# EAGLE board SparkFun_RTK_EVK-Panel (EAGLE 9.6.2), part 1 of 2
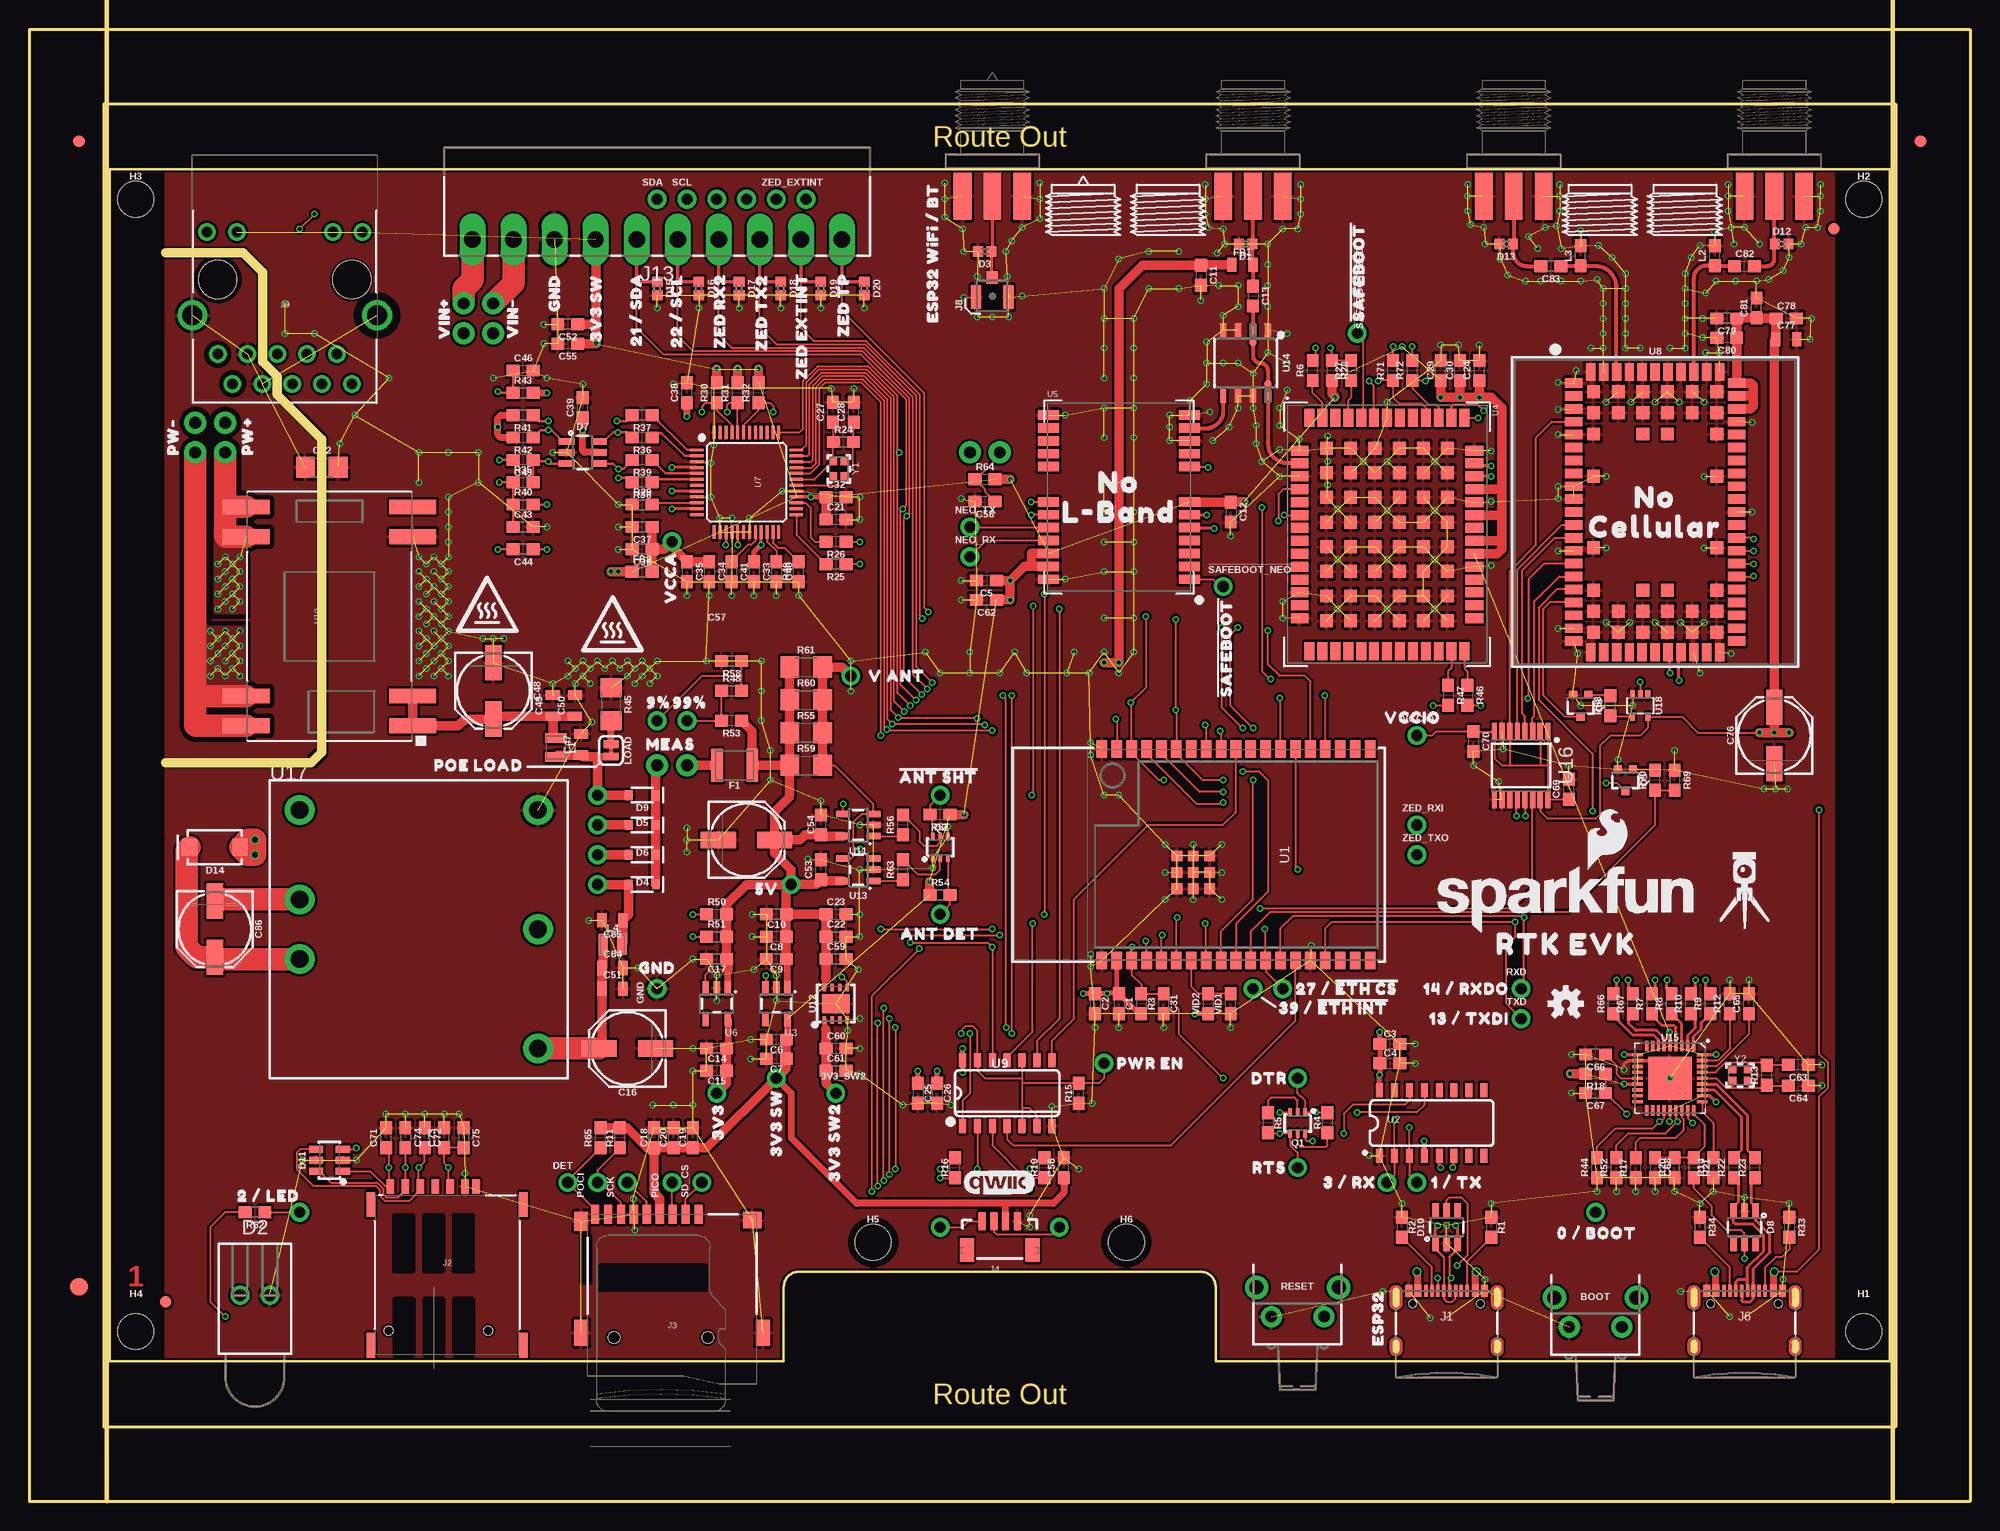
[diagram p0: board, top side]
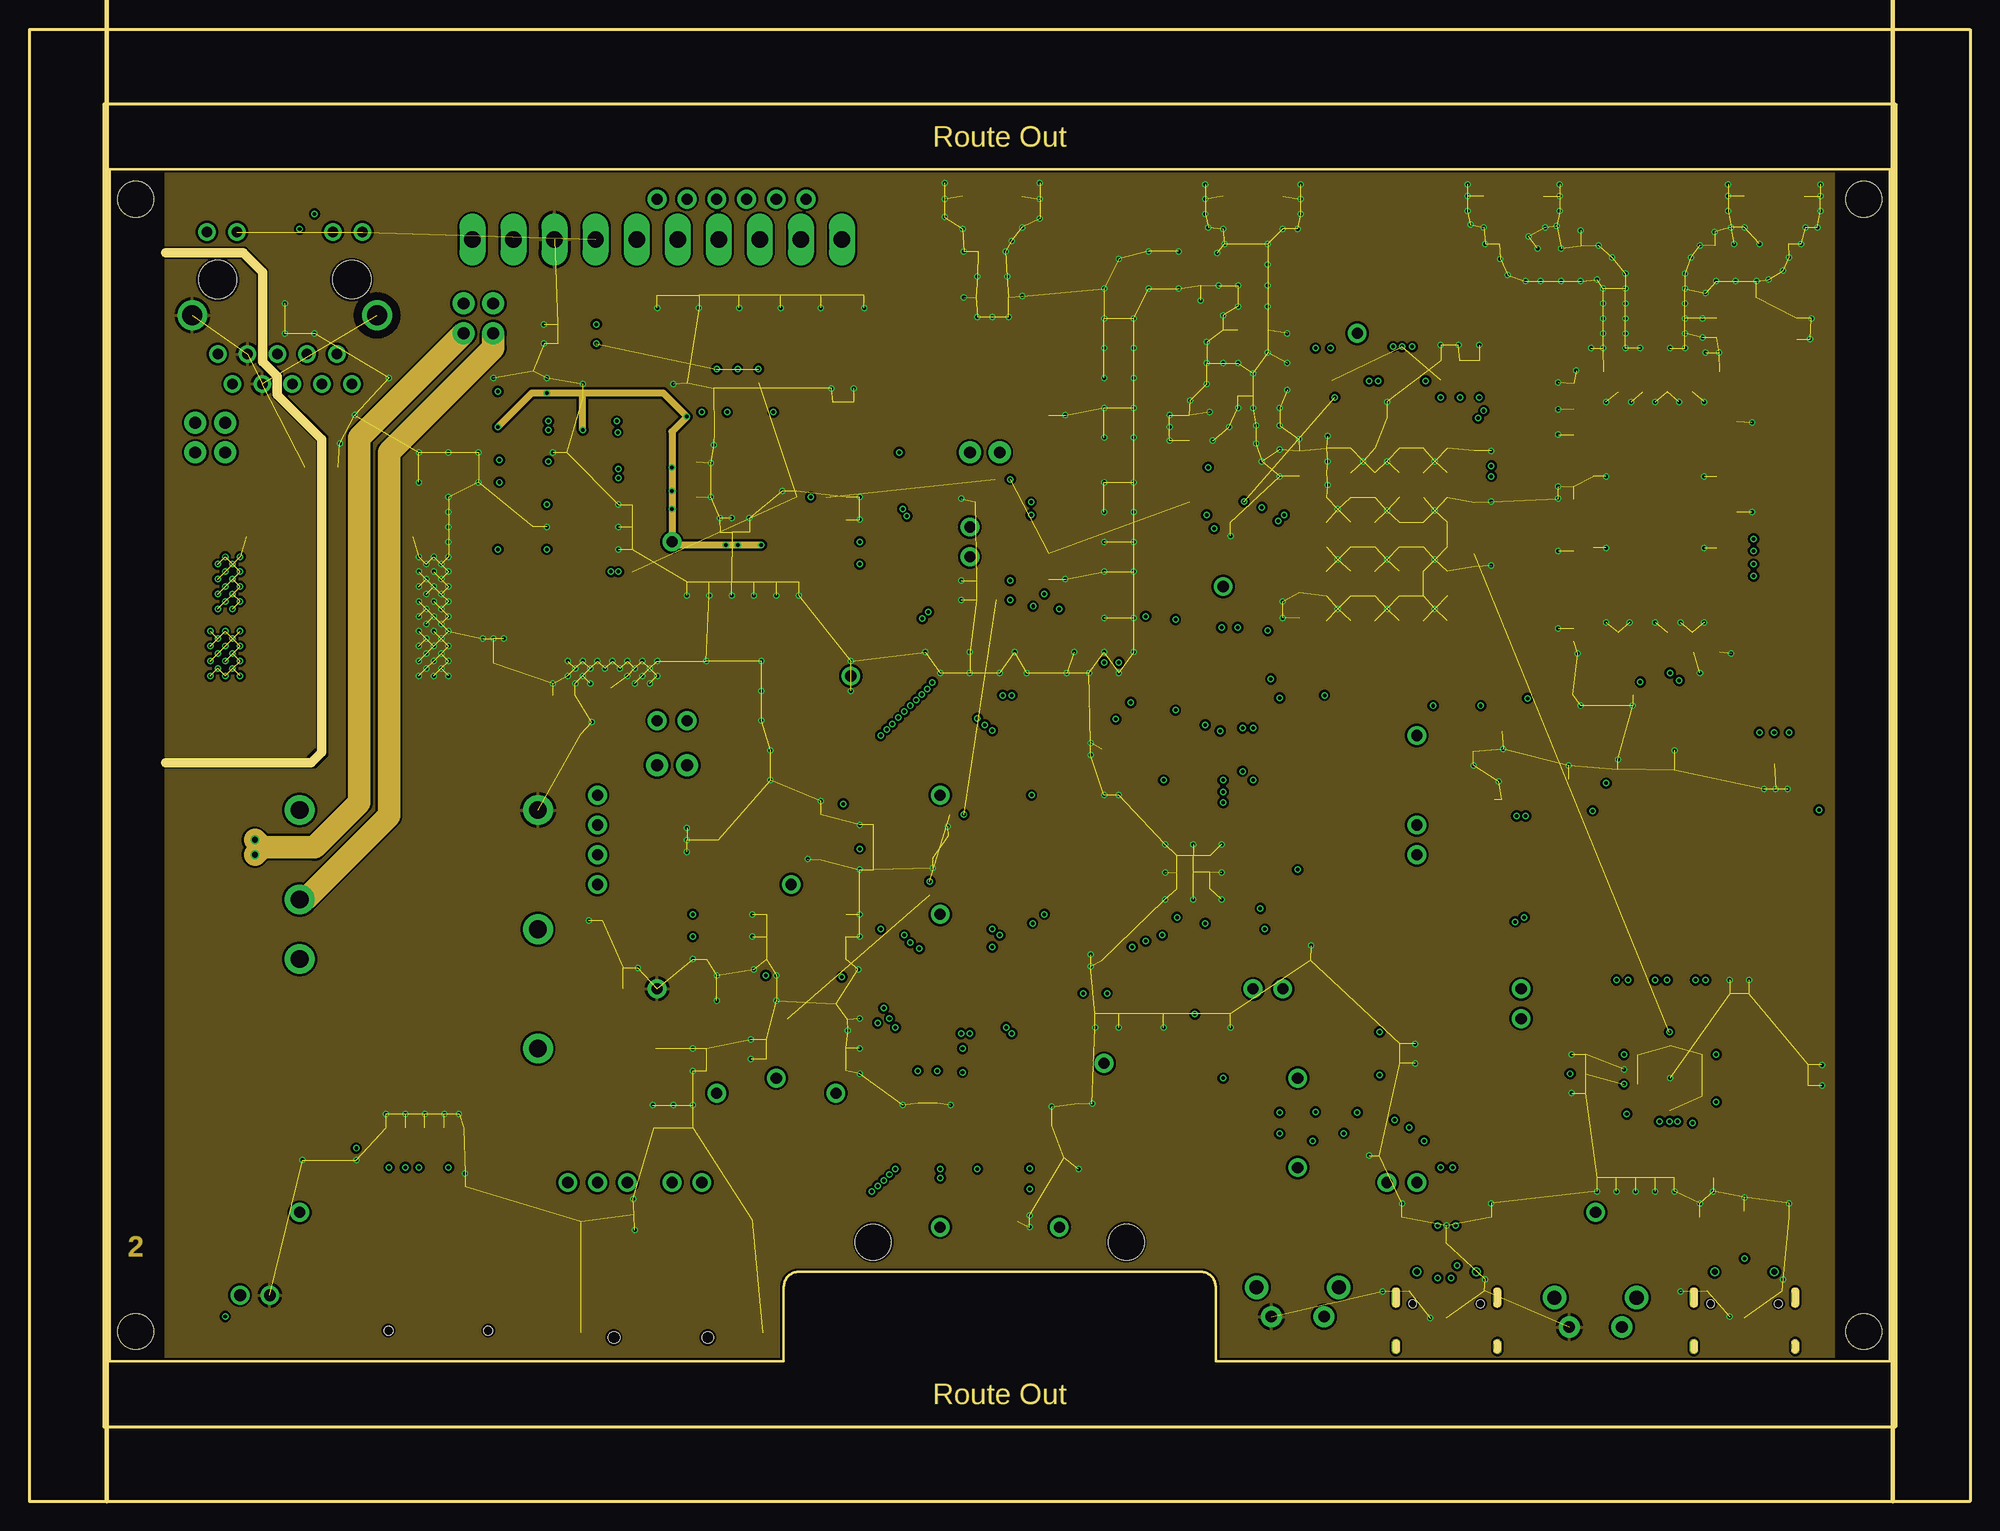
[diagram p1: board, inner layer Route2]
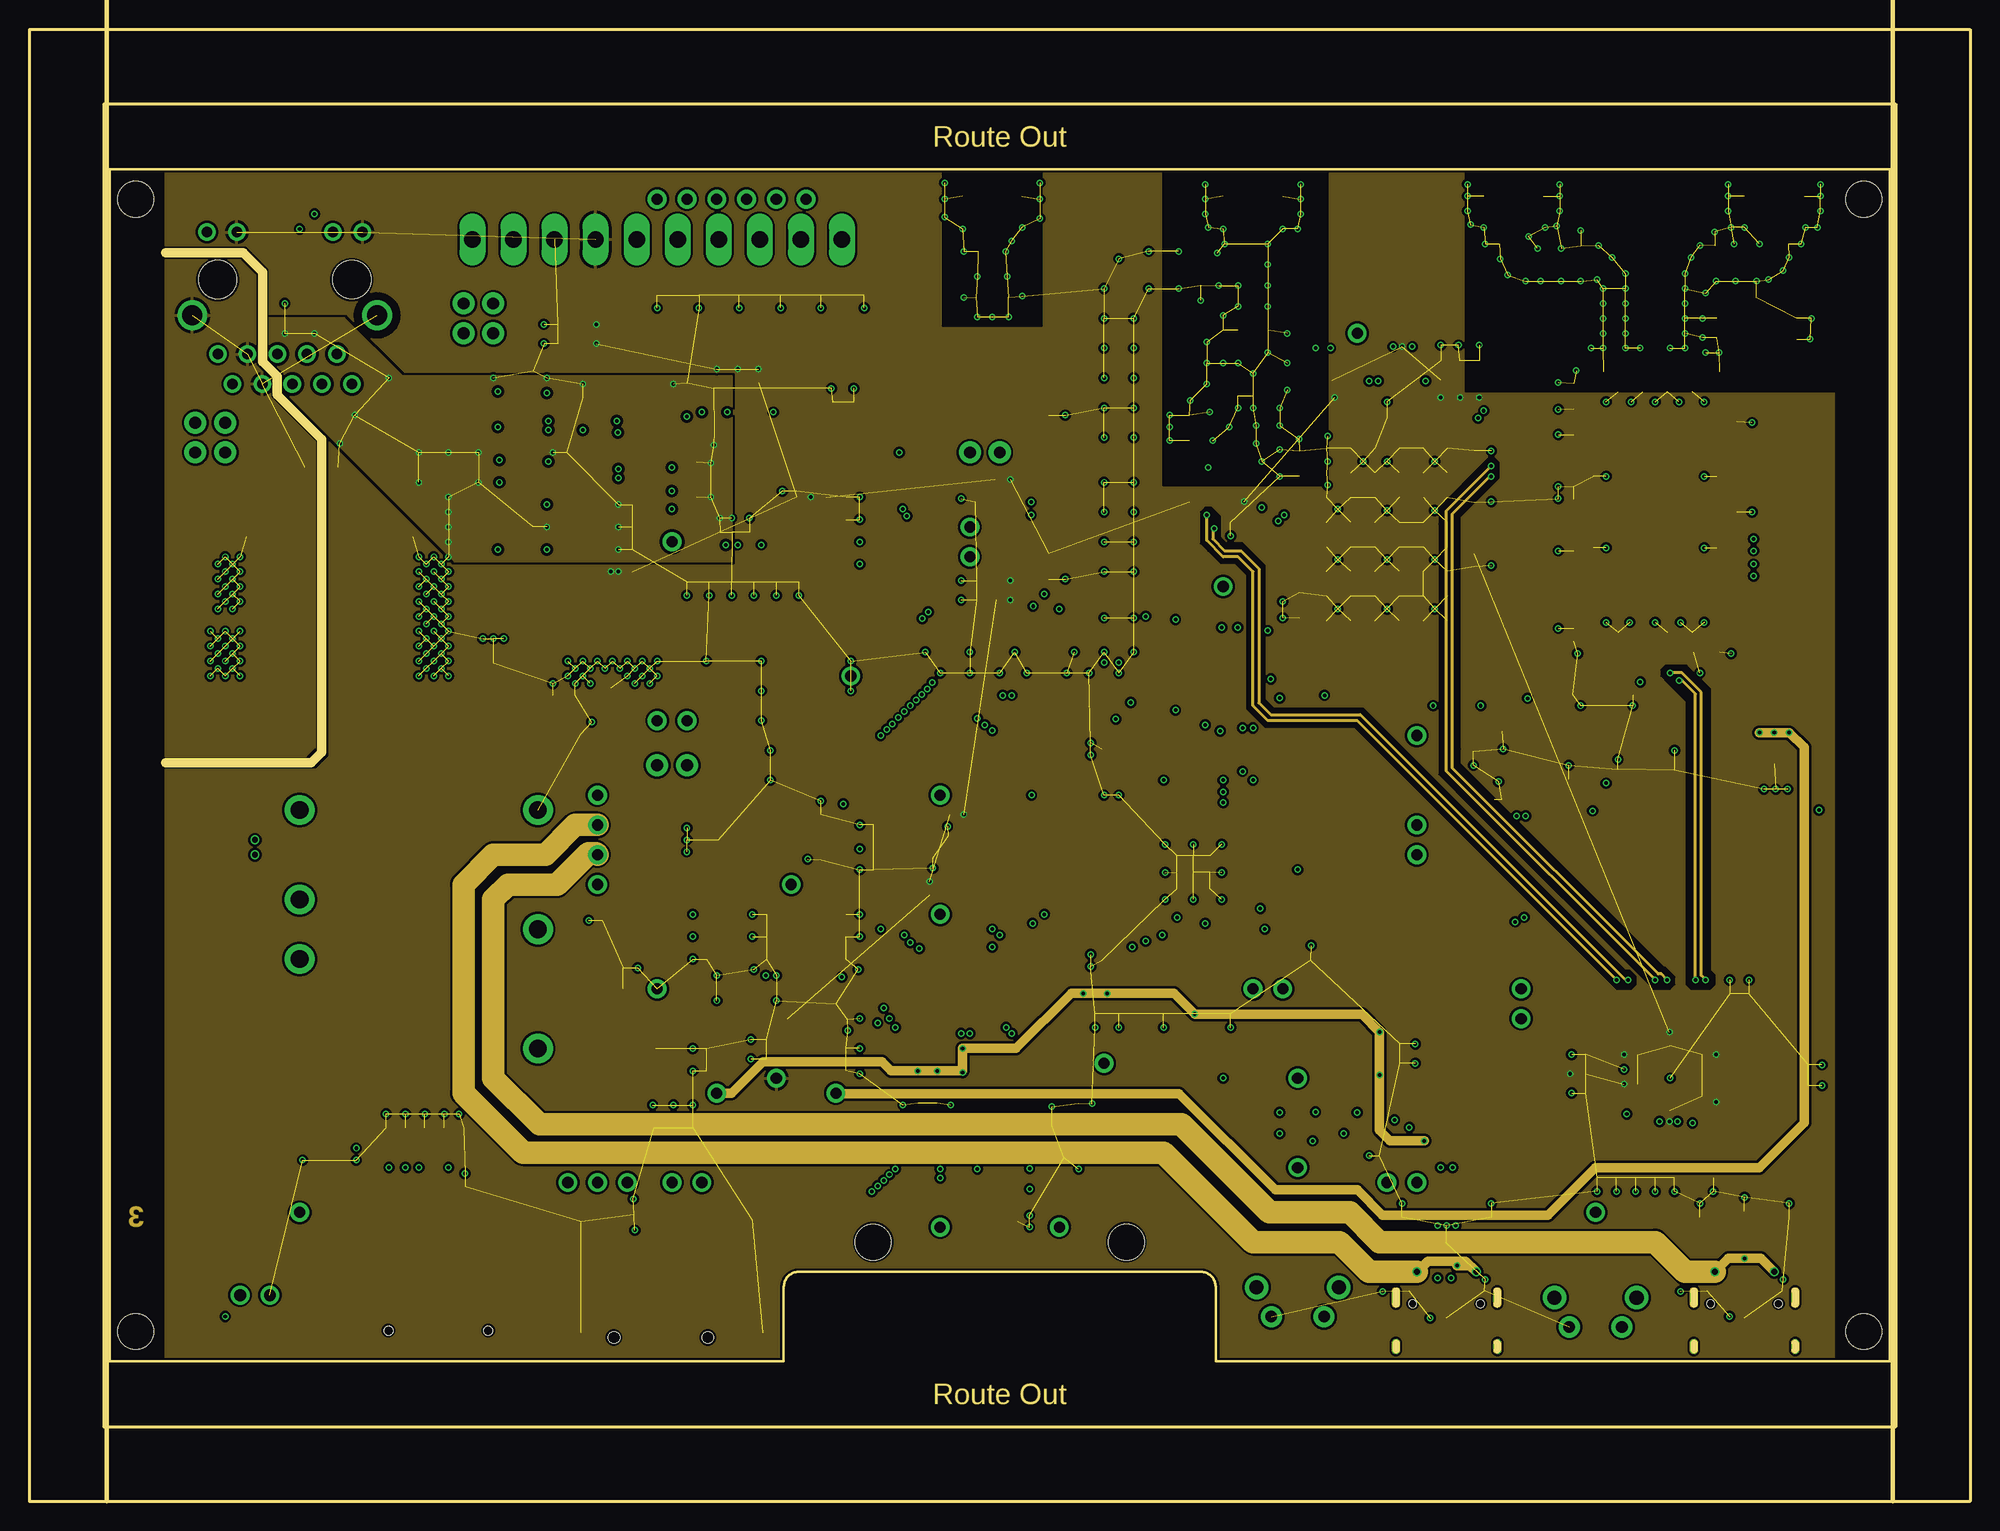
[diagram p2: board, inner layer Route15]
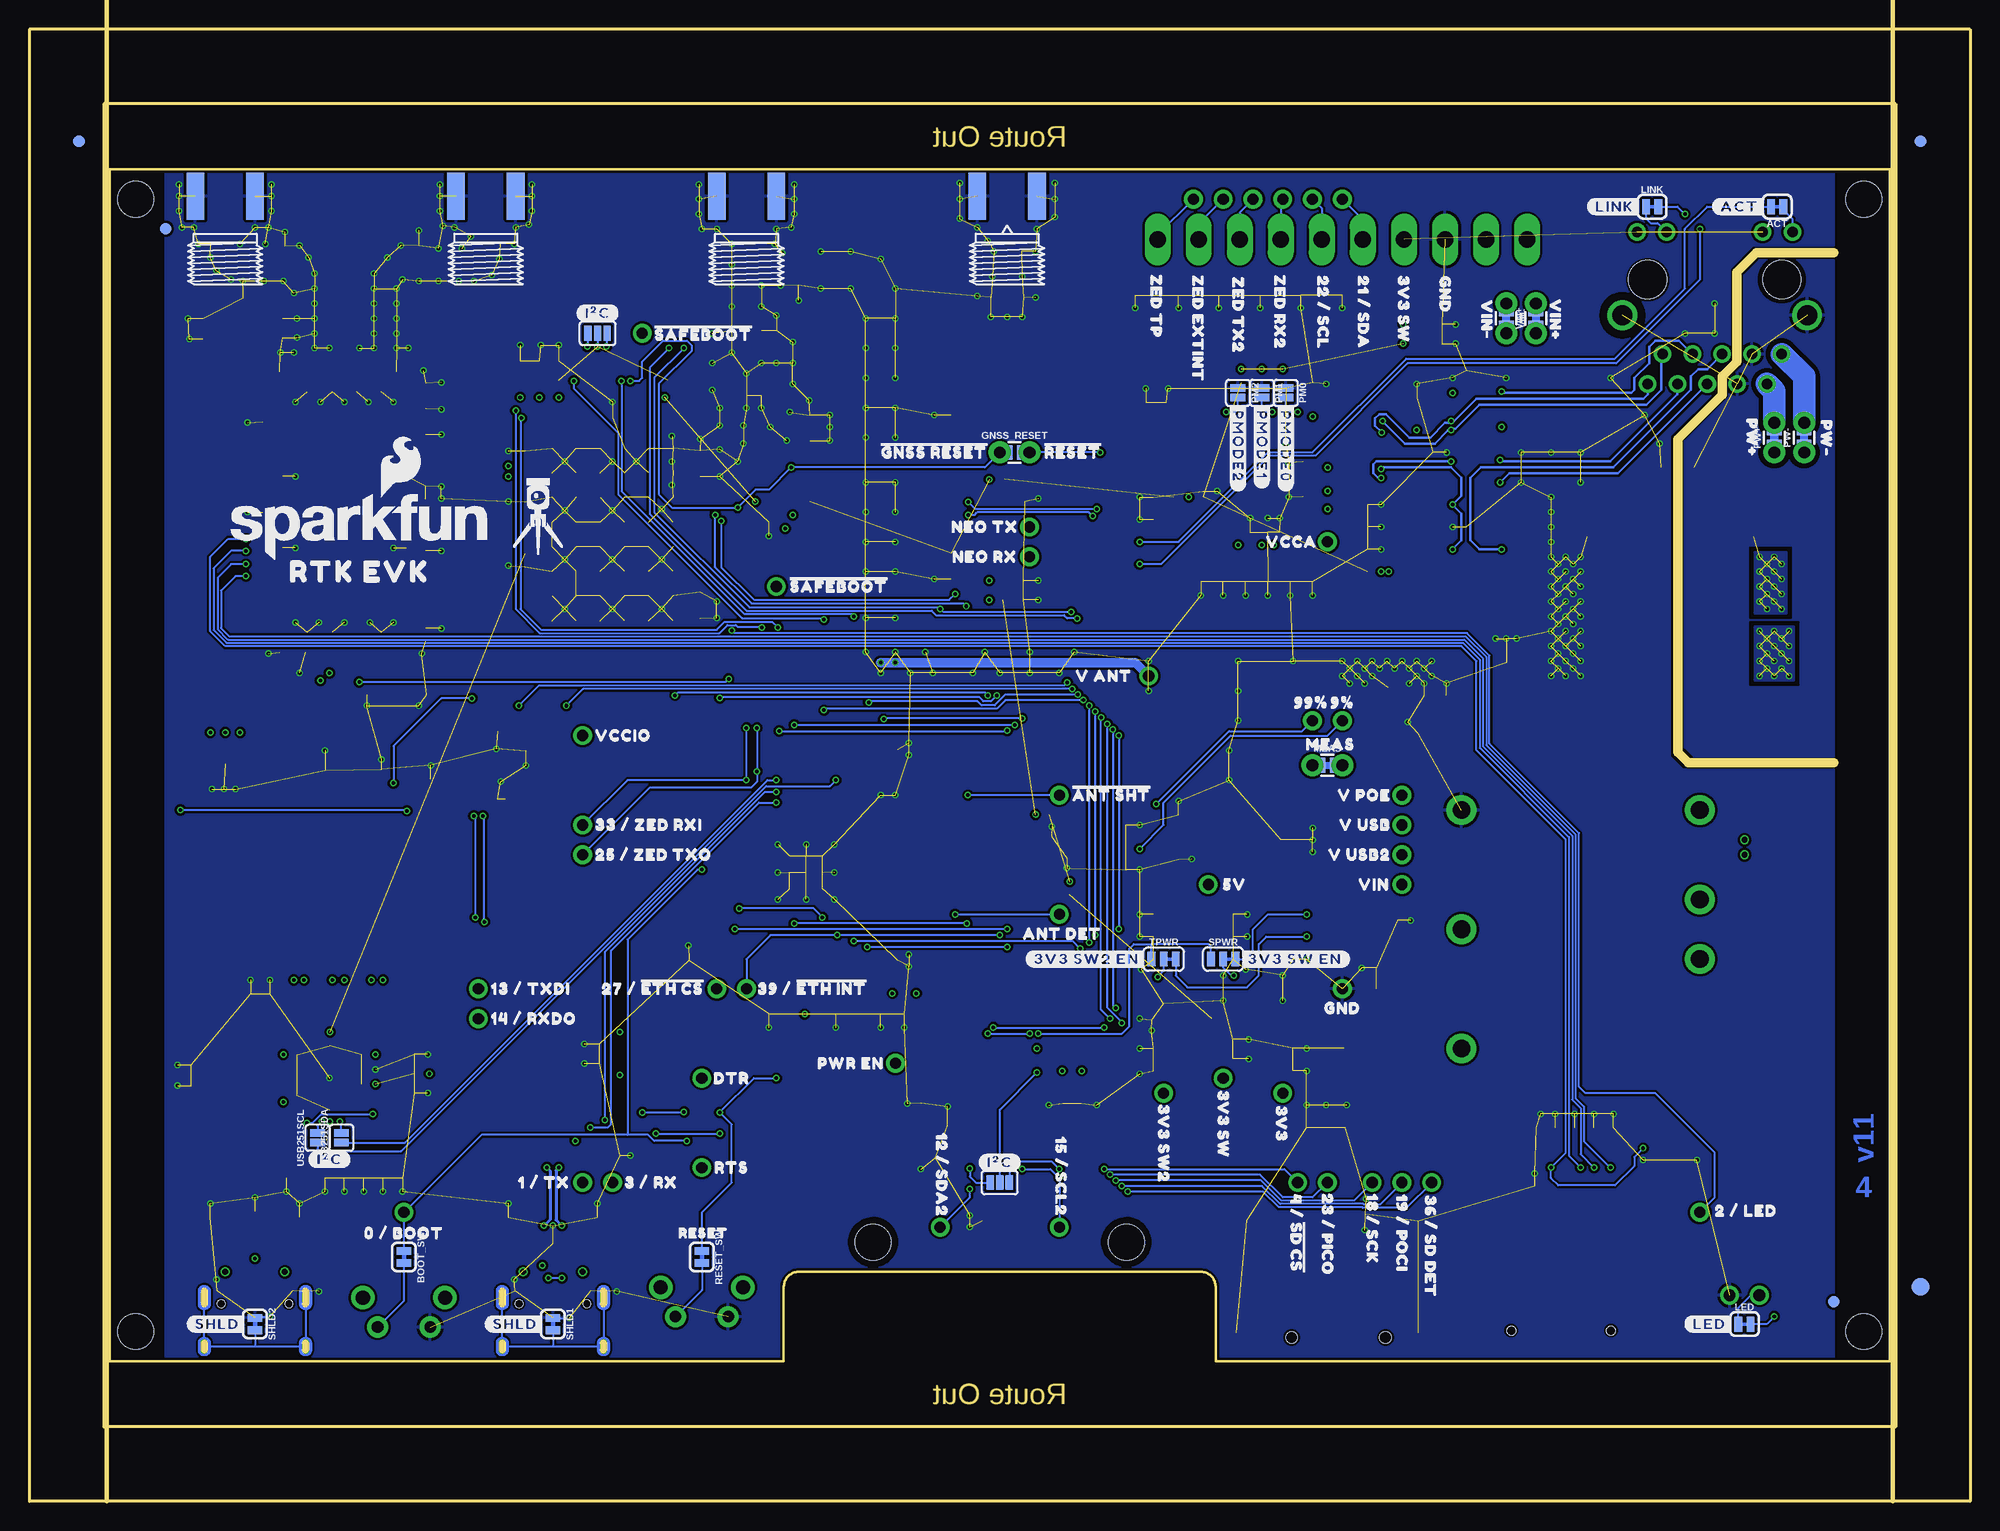
[diagram p3: board, bottom side, seen from below]

Size 165.48 x 125.48 mm. Coordinates in mm from the lower left corner, seen from the top.
Outline: 6.86,11.94 64.33,11.94 64.33,18.29 arc-90 65.59,19.56 99.89,19.56 arc-90 101.16,18.29 101.16,11.94 158.62,11.94 158.62,113.54 6.86,113.54 6.86,11.94
Outline: 0,0 165.48,0 165.48,125.48 0,125.48 0,0
Outline: 6.35,6.35 159.13,6.35 159.13,119.13 6.35,119.13 6.35,6.35
Copper layers (1*2*15*16): Top 0.035559375mm / dielectric 0.47751875mm / Route2 0.035559375mm / dielectric 0.47751875mm / Route15 0.035559375mm / dielectric 0.47751875mm / Bottom 0.035559375mm
Design rules "SparkFun_RTK_EVK": minimum track width 5mil, minimum drill 0.2mm, track to track 5mil, track to pad 5mil, pad to pad 5mil, via to via 5mil, smd to smd 5mil, copper to edge 7mil, drill to drill 7mil, minimum pad ring 5mil, minimum via ring 5mil, stop-mask expansion 2.5mil, vias tented up to drill 25mil, thermal gap 10mil
tKeepout: area 6.9,18.3 to 11.6,107.2; area 153.9,18.3 to 158.6,107.2
tRestrict: 1 lines
Milling: 11 lines

## Footprints (pad centres in the part's own frame; a part is rotated, then mirrored left to right if it is on the bottom)
1X01_NO_SILK = drill 0.95 pad 1.6: 1 0,0
SMT-JUMPER_2_NC_TRACE_SILK = smd 0.66 x 1.27: 1 -0.521,0; 2 0.521,0
TACTILE_SWITCH_PTH_RA_8-020 = drill 1 pad 1.8: 1 -2.25,0; 2 2.25,0 | drill 1.2 pad 2: M1 -3.5,2.5; M2 3.5,2.5
SMT-JUMPER_2_SOIC-PAD_NO-PASTE = smd 0.55 x 0.55: 1 1.75,0
0603 = smd 1.1 x 1: 1 -0.85,0; 2 0.85,0
PANASONIC_D = smd 3 x 1.4: + 2.4,0; - -2.4,0
1206 = smd 1.6 x 1.8: 1 -1.4,0; 2 1.4,0
0805 = smd 0.8 x 1.2: 1 -0.9,0; 2 0.9,0
0402 = smd 0.85 x 0.9: 1 -0.58,0; 2 0.58,0
CBI-RIGHT-ANGLE-PTH = drill 1 pad 1.6: A -1.27,5; C 1.27,5
SOD-323 = smd 0.63 x 0.83: A 1.15,0; C -1.15,0
SOT-23-6 = smd 0.55 x 1.35: 1 -0.95,-1.375; 2 0,-1.375; 3 0.95,-1.375; 4 0.95,1.375; 5 0,1.375; 6 -0.95,1.375
SOT23-6L = smd 0.6 x 1.2: 1 -0.95,-1.15; 2 0,-1.15; 3 0.95,-1.15; 4 0.95,1.15; 5 0,1.15; 6 -0.95,1.15
SMA-DIODE = smd 1.27 x 1.47: A -2.15,0; C 2.15,0
FIDUCIAL-1X2 = smd 1 x 1: 1 0,0
FIDUCIAL-1.5X3 = smd 1.5 x 1.5: 1 0,0
RP-SMA-EDGE = smd 1.5 x 4: GND@0 -2.54,0; GND@1 2.54,0; SIG 0,0 | smd 1.5 x 4 bottom: GND@2 -2.54,0; GND@3 2.54,0
1210 = smd 1 x 2.8: 1 -1.5,0; 2 1.5,0
COMBO-JUMPER_2_NO = smd 0.635 x 1.27: 1 -0.508,0; 2 0.508,0 | drill 1.016 pad 1.88: 3 -1.27,0; 4 1.27,0
SMA-EDGE = smd 1.5 x 4: GND@0 -2.54,0; GND@1 2.54,0; SIG 0,0 | smd 1.5 x 4 bottom: GND@2 -2.54,0; GND@3 2.54,0
STAND-OFF-TIGHT = hole 3.048: 0,0
SMT-JUMPER_3_NO_SILK = smd 0.635 x 1.27: 1 -0.813,0; 2 0,0; 3 0.813,0
USB-C-16P_4LAYER-PADS = smd 0.3 x 1: A5 -1.25,-0.34; A6 -0.25,-0.34; A7 0.25,-0.34; A8 1.25,-0.34; B5 1.75,-0.34; B6 0.75,-0.34; B7 -0.75,-0.34; B8 -1.75,-0.34 | smd 0.6 x 1: GND -3.225,-0.34; GND2 3.225,-0.34; VBUS1 -2.45,-0.34; VBUS2 2.45,-0.34 | drill 0.4 pad 0.6 long: SHLD1 -4.318,-0.915; SHLD2 4.318,-0.915; SHLD3 -4.318,-5.095; SHLD4 4.318,-5.095 | hole 0.65: -2.89,-1.445; 2.89,-1.445
NANO_SIM_PP = smd 0.7 x 2.1: A1 6.495,6; A2 -6.495,6; A3 -6.495,-6; A4 6.495,-6 | smd 0.65 x 1.23: C1 0.255,7.535; C2 -2.285,7.535; C3 -4.825,7.535; C5 1.525,7.535; C6 -1.015,7.535; C7 -3.555,7.535; CD 2.475,7.535 | hole 0.75: 3.505,-4.75; -4.995,-4.75
MICROSD-EXTERNALPIN = smd 0.7 x 1.6: 1 2.25,10.5; 2 1.15,10.5; 3 0.05,10.5; 4 -1.05,10.5; 5 -2.15,10.5; 6 -3.25,10.5; 7 -4.35,10.5; 8 -5.45,10.5; 9 -6.55,10.5 | smd 1.2 x 1.6: 10 -7.75,9.9 | smd 1.2 x 2.2: 11 -7.75,0.4; 12 7.75,0.4 | smd 1.6 x 1.4: 13 6.85,10 | hole 1: 3.05,0; -4.95,0
JST04_1MM_VERT = smd 0.6 x 1.55: 1 -1.5,0.775; 2 -0.5,0.775; 3 0.5,0.775; 4 1.5,0.775 | smd 1.2 x 2: NC1 -2.8,3.2; NC2 2.8,3.2
U.FL_REDUCED_FOOTPRINT = smd 2 x 0.85: 1 -0.1,1.375; 2 -0.1,-1.375 | smd 1.05 x 1: FEED 1.575,0
MAGJACK-SYM_LED = drill 0.9 pad 1.5: 1 -5.715,8.89; 2 -4.445,6.35; 3 -3.175,8.89; 4 -1.905,6.35; 5 -0.635,8.89; 6 0.635,6.35; 7 1.905,8.89; 8 3.175,6.35; 9 4.445,8.89; 10 5.715,6.35; 11 -6.63,-4.06; 12 -4.09,-4.06; 13 4.09,-4.06; 14 6.63,-4.06 | drill 1.7 pad 2.4: S1 -7.875,3.05; S2 7.875,3.05 | hole 3.25: -5.715,0; 5.715,0
1X10_SCREW_TERMINAL_3.5MM = drill 1.4 pad 2.2 long: 1 -15.75,2.8; 2 -12.25,2.8; 3 -8.75,2.8; 4 -5.25,2.8; 5 -1.75,2.8; 6 1.75,2.8; 7 5.25,2.8; 8 8.75,2.8; 9 12.25,2.8; 10 15.75,2.8
0805-WIDE = smd 0.8 x 1.8: 1 -0.8,0; 2 0.8,0
0603_NO-CREAM = smd 1.1 x 1: 1 -0.85,0; 2 0.85,0
COMBO-JUMPER_2_NC_TRACE = smd 0.635 x 1.27: 1 -0.508,0; 2 0.508,0 | drill 1.016 pad 1.88: 3 -1.27,0; 4 1.27,0
SMT-JUMPER_2_NO_SILK = smd 0.635 x 1.27: 1 -0.406,0; 2 0.406,0
SC70-6 = smd 0.3 x 0.66: 1 -0.65,-0.92; 2 0,-0.92; 3 0.65,-0.92; 4 0.65,0.92; 5 0,0.92; 6 -0.65,0.92
SOT323 = smd 0.7 x 0.7: 1 -0.65,-0.925; 2 0.65,-0.925; 3 0,0.925
SMT-JUMPER_3_1-NC_TRACE_SILK = smd 0.66 x 1.27: 1 -1.041,0; 2 0,0; 3 1.041,0
ESP32-WROVER-E/IE = smd 0.9 x 1.5: 1 7.8,9; 2 6.53,9; 3 5.26,9; 4 3.99,9; 5 2.72,9; 6 1.45,9; 7 0.18,9; 8 -1.09,9; 9 -2.36,9; 10 -3.63,9; 11 -4.9,9; 12 -6.17,9; 13 -7.44,9; 14 -8.71,9; 15 -9.98,9; 16 -11.25,9; 17 -12.52,9; 18 -13.79,9; 19 -15.06,9; 20 -15.06,-9; 21 -13.79,-9; 22 -12.52,-9; 23 -11.25,-9; 24 -9.98,-9; 25 -8.71,-9; 26 -7.44,-9; 27 -6.17,-9; 28 -4.9,-9; 29 -3.63,-9; 30 -2.36,-9; 31 -1.09,-9; 32 0.18,-9; 33 1.45,-9; 34 2.72,-9; 35 3.99,-9; 36 5.26,-9; 37 6.53,-9; 38 7.8,-9 | smd 0.9 x 0.9: GND 0,1.5; GNDT1 -1.4,2.9; GNDT2 -1.4,1.5; GNDT3 -1.4,0.1; GNDT4 0,0.1; GNDT5 1.4,0.1; GNDT6 1.4,1.5; GNDT7 1.4,2.9; GNDT8 0,2.9
SO016 = smd 0.6 x 1.2: 1 -4.445,-2.8; 2 -3.175,-2.8; 3 -1.905,-2.8; 4 -0.635,-2.8; 5 0.635,-2.8; 6 1.905,-2.8; 7 3.175,-2.8; 8 4.445,-2.8; 9 4.445,2.8; 10 3.175,2.8; 11 1.905,2.8; 12 0.635,2.8; 13 -0.635,2.8; 14 -1.905,2.8; 15 -3.175,2.8; 16 -4.445,2.8
SOT23-5 = smd 0.55 x 1.2: 1 -0.95,-1.3; 2 0,-1.3; 3 0.95,-1.3; 4 0.95,1.3; 5 -0.95,1.3
ZED-F9P = smd 0.85 x 1.52: 1 -7.15,-7.45; 2 -6.05,-7.45; 3 -4.95,-7.45; 4 -3.85,-7.45; 5 -2.75,-7.45; 6 -1.65,-7.45; 7 -0.55,-7.45; 8 0.55,-7.45; 9 1.65,-7.45; 10 2.75,-7.45; 11 3.85,-7.45; 12 4.95,-7.45; 13 6.05,-7.45; 14 7.15,-7.45; 28 7.15,7.45; 29 6.05,7.45; 30 4.95,7.45; 31 3.85,7.45; 32 2.75,7.45; 33 1.65,7.45; 34 0.55,7.45; 35 -0.55,7.45; 36 -1.65,7.45; 37 -2.75,7.45; 38 -3.85,7.45; 39 -4.95,7.45; 40 -6.05,7.45; 41 -7.15,7.45 | smd 1.52 x 0.85: 15 9.95,-6.6; 16 9.95,-5.5; 17 9.95,-4.4; 18 9.95,-3.3; 19 9.95,-2.2; 20 9.95,-1.1; 21 9.95,0; 22 9.95,1.1; 23 9.95,2.2; 24 9.95,3.3; 25 9.95,4.4; 26 9.95,5.5; 27 9.95,6.6; 42 -9.95,6.6; 43 -9.95,5.5; 44 -9.95,4.4; 45 -9.95,3.3; 46 -9.95,2.2; 47 -9.95,1.1; 48 -9.95,0; 49 -9.95,-1.1; 50 -9.95,-2.2; 51 -9.95,-3.3; 52 -9.95,-4.4; 53 -9.95,-5.5; 54 -9.95,-6.6 | smd 1.1 x 1.1: 55 -1.05,-1.05; 56 -3.15,-1.05; 57 -5.25,-1.05; 58 -7.35,-1.05; 59 -1.05,-3.1; 60 -3.15,-3.1; 61 -5.25,-3.1; 62 -7.35,-3.1; 63 -1.05,-5.15; 64 -3.15,-5.15; 65 -5.25,-5.15; 66 -7.35,-5.15; 67 -1.05,5.15; 68 -3.15,5.15; 69 -5.25,5.15; 70 -7.35,5.15; 71 -1.05,3.1; 72 -3.15,3.1; 73 -5.25,3.1; 74 -7.35,3.1; 75 -1.05,1.05; 76 -3.15,1.05; 77 -5.25,1.05; 78 -7.35,1.05; 79 1.05,1.05; 80 3.15,1.05; 81 5.25,1.05; 82 7.35,1.05; 83 1.05,3.1; 84 3.15,3.1; 85 5.25,3.1; 86 7.35,3.1; 87 1.05,5.15; 88 3.15,5.15; 89 5.25,5.15; 90 7.35,5.15; 91 1.05,-5.15; 92 3.15,-5.15; 93 5.25,-5.15; 94 7.35,-5.15; 95 1.05,-3.1; 96 3.15,-3.1; 97 5.25,-3.1; 98 7.35,-3.1; 99 1.05,-1.05; 100 3.15,-1.05; 101 5.25,-1.05; 102 7.35,-1.05
NEO-M9N/M8T/M8U/D9S = smd 1.8 x 0.8: 1 6,-7; 2 6,-5.9; 3 6,-4.8; 4 6,-3.7; 5 6,-2.6; 6 6,-1.5; 7 6,-0.4; 8 6,2.6; 9 6,3.7; 10 6,4.8; 11 6,5.9; 12 6,7; 13 -6,7; 14 -6,5.9; 15 -6,4.8; 16 -6,3.7; 17 -6,2.6; 18 -6,-0.4; 19 -6,-1.5; 20 -6,-2.6; 21 -6,-3.7; 22 -6,-4.8; 23 -6,-5.9; 24 -6,-7
LQFP-48 = smd 0.254 x 1.143: 1 -2.75,-4.25; 2 -2.25,-4.25; 3 -1.75,-4.25; 4 -1.25,-4.25; 5 -0.75,-4.25; 6 -0.25,-4.25; 7 0.25,-4.25; 8 0.75,-4.25; 9 1.25,-4.25; 10 1.75,-4.25; 11 2.25,-4.25; 12 2.75,-4.25; 25 2.75,4.25; 26 2.25,4.25; 27 1.75,4.25; 28 1.25,4.25; 29 0.75,4.25; 30 0.25,4.25; 31 -0.25,4.25; 32 -0.75,4.25; 33 -1.25,4.25; 34 -1.75,4.25; 35 -2.25,4.25; 36 -2.75,4.25 | smd 1.143 x 0.254: 13 4.25,-2.75; 14 4.25,-2.25; 15 4.25,-1.75; 16 4.25,-1.25; 17 4.25,-0.75; 18 4.25,-0.25; 19 4.25,0.25; 20 4.25,0.75; 21 4.25,1.25; 22 4.25,1.75; 23 4.25,2.25; 24 4.25,2.75; 37 -4.25,2.75; 38 -4.25,2.25; 39 -4.25,1.75; 40 -4.25,1.25; 41 -4.25,0.75; 42 -4.25,0.25; 43 -4.25,-0.25; 44 -4.25,-0.75; 45 -4.25,-1.25; 46 -4.25,-1.75; 47 -4.25,-2.25; 48 -4.25,-2.75
LARA-LGA = smd 0.8 x 1.5: 1 -11,-6.95; 2 -9.9,-6.95; 3 -8.8,-6.95; 4 -7.7,-6.95; 5 -6.6,-6.95; 6 -5.5,-6.95; 7 -4.4,-6.95; 8 -3.3,-6.95; 9 -2.2,-6.95; 10 -1.1,-6.95; 11 0,-6.95; 12 1.1,-6.95; 13 2.2,-6.95; 14 3.3,-6.95; 15 4.4,-6.95; 16 5.5,-6.95; 17 6.6,-6.95; 18 7.7,-6.95; 19 8.8,-6.95; 20 9.9,-6.95; 21 11,-6.95; 33 11,6.95; 34 9.9,6.95; 35 8.8,6.95; 36 7.7,6.95; 37 6.6,6.95; 38 5.5,6.95; 39 4.4,6.95; 40 3.3,6.95; 41 2.2,6.95; 42 1.1,6.95; 43 0,6.95; 44 -1.1,6.95; 45 -2.2,6.95; 46 -3.3,6.95; 47 -4.4,6.95; 48 -5.5,6.95; 49 -6.6,6.95; 50 -7.7,6.95; 51 -8.8,6.95; 52 -9.9,6.95; 53 -11,6.95 | smd 1.5 x 0.8: 22 11.95,-5.5; 23 11.95,-4.4; 24 11.95,-3.3; 25 11.95,-2.2; 26 11.95,-1.1; 27 11.95,0; 28 11.95,1.1; 29 11.95,2.2; 30 11.95,3.3; 31 11.95,4.4; 32 11.95,5.5; 54 -11.95,5.5; 55 -11.95,4.4; 56 -11.95,3.3; 57 -11.95,2.2; 58 -11.95,1.1; 59 -11.95,0; 60 -11.95,-1.1; 61 -11.95,-2.2; 62 -11.95,-3.3; 63 -11.95,-4.4; 64 -11.95,-5.5 | smd 1.1 x 1.1: 65 -10.25,-5.25; 66 -10.25,-3.15; 67 -10.25,-1.05; 68 -10.25,1.05; 69 -10.25,3.15; 70 -10.25,5.25; 71 -8.45,-5.25; 72 -8.45,-3.15; 73 -8.45,-1.05; 74 -8.45,1.05; 75 -8.45,3.15; 76 -8.45,5.25; 77 -6.65,-5.25; 78 -6.65,5.25; 79 -3.05,-5.25; 80 -3.05,5.25; 81 3.05,-5.25; 82 3.05,5.25; 83 6.65,-5.25; 84 6.65,5.25; 85 8.45,-5.25; 86 8.45,-3.15; 87 8.45,-1.05; 88 8.45,1.05; 89 8.45,3.15; 90 8.45,5.25; 91 10.25,-5.25; 92 10.25,-3.15; 93 10.25,-1.05; 94 10.25,1.05; 95 10.25,3.15; 96 10.25,5.25; 97 -6.65,-1.05; 98 -6.65,1.05; 99 6.65,-1.05; 100 6.65,1.05
SO14 = smd 0.6 x 1.2: 1 -3.175,-2.8; 2 -1.905,-2.8; 3 -0.635,-2.8; 4 0.635,-2.8; 5 1.905,-2.8; 6 3.175,-2.8; 7 4.445,-2.8; 8 4.445,2.8; 9 3.175,2.8; 10 1.905,2.8; 11 0.635,2.8; 12 -0.635,2.8; 13 -1.905,2.8; 14 -3.175,2.8
DP990X = smd 1.25 x 4: 1 -9.33,-7.1; 2 -6.79,-7.1; 3 6.79,-7.1; 4 9.33,-7.1; 5 9.33,7.1; 6 6.79,7.1; 7 -6.79,7.1; 8 -9.33,7.1
UDFN-8 = smd 0.3 x 0.65: 1 -0.975,-1.375; 2 -0.325,-1.375; 3 0.325,-1.375; 4 0.975,-1.375; 5 0.975,1.375; 6 0.325,1.375; 7 -0.325,1.375; 8 -0.975,1.375 | smd 2.35 x 1.6: EP 0,0
XX21 = smd 0.6 x 1.2: 1 -1.905,-2.8; 2 -0.635,-2.8; 3 0.635,-2.8; 4 1.905,-2.8; 5 1.905,2.8; 6 0.635,2.8; 7 -0.635,2.8; 8 -1.905,2.8
QFN-36 = smd 0.9 x 0.28: 1 -2.75,2; 2 -2.75,1.5; 3 -2.75,1; 4 -2.75,0.5; 5 -2.75,0; 6 -2.75,-0.5; 7 -2.75,-1; 8 -2.75,-1.5; 9 -2.75,-2; 19 2.75,-2; 20 2.75,-1.5; 21 2.75,-1; 22 2.75,-0.5; 23 2.75,0; 24 2.75,0.5; 25 2.75,1; 26 2.75,1.5; 27 2.75,2 | smd 0.28 x 0.9: 10 -2,-2.75; 11 -1.5,-2.75; 12 -1,-2.75; 13 -0.5,-2.75; 14 0,-2.75; 15 0.5,-2.75; 16 1,-2.75; 17 1.5,-2.75; 18 2,-2.75; 28 2,2.75; 29 1.5,2.75; 30 1,2.75; 31 0.5,2.75; 32 0,2.75; 33 -0.5,2.75; 34 -1,2.75; 35 -1.5,2.75; 36 -2,2.75 | smd 3.7 x 3.7: EP 0,0
SOP65P640X120-16N = smd 1.5 x 0.45: 1 -2.9,2.275; 2 -2.9,1.625; 3 -2.9,0.975; 4 -2.9,0.325; 5 -2.9,-0.325; 6 -2.9,-0.975; 7 -2.9,-1.625; 8 -2.9,-2.275; 9 2.9,-2.275; 10 2.9,-1.625; 11 2.9,-0.975; 12 2.9,-0.325; 13 2.9,0.325; 14 2.9,0.975; 15 2.9,1.625; 16 2.9,2.275
URB_YMD-15WR3 = drill 1.499 pad 2.54: 1 -10.16,10.16; 2 -10.16,2.54; 3 -10.16,-2.54; 4 10.16,-10.16; 5 10.16,0; 6 10.16,10.16
SOT353 = smd 0.42 x 0.7: 1 -0.65,-0.95; 2 0,-0.95; 3 0.65,-0.95; 4 0.65,0.95; 5 -0.65,0.95
CRYSTAL-SMD-2.0X1.6MM = smd 0.75 x 0.7: 1 -0.675,-0.5; 2 0.675,-0.5; 3 0.675,0.5; 4 -0.675,0.5

## Placement (x,y rotation side)
3V3  TEST-POINTPOGO_PTH  [1X01_NO_SILK]  58.61,34.8 270 top
3V3_SW  TEST-POINTPOGO_PTH  [1X01_NO_SILK]  63.69,36.07 270 top
3V3_SW2  TEST-POINTPOGO_PTH  [1X01_NO_SILK]  68.77,34.8 0 top
5V  TEST-POINTPOGO_PTH  [1X01_NO_SILK]  64.96,52.58 270 top
9%  TEST-POINTPOGO_PTH  [1X01_NO_SILK]  53.53,66.55 0 top
99%  TEST-POINTPOGO_PTH  [1X01_NO_SILK]  56.07,66.55 0 top
!SAFEBOOT_NEO!  TEST-POINTPOGO_PTH  [1X01_NO_SILK]  101.79,77.98 0 top
!SAFEBOOT_ZED!  TEST-POINTPOGO_PTH  [1X01_NO_SILK]  113.22,99.57 0 top
ACT  JUMPER-SMT_2_NC_TRACE_SILK  [SMT-JUMPER_2_NC_TRACE_SILK]  16.45,110.36 180 bottom
ANT_DET  TEST-POINTPOGO_PTH  [1X01_NO_SILK]  77.66,50.04 0 top
ANT_SHT  TEST-POINTPOGO_PTH  [1X01_NO_SILK]  77.66,60.2 0 top
BOOT  MOMENTARY-SWITCH-SPST-PTH-RIGHT-ANGLE-8-020  [TACTILE_SWITCH_PTH_RA_8-020]  133.54,14.86 0 top
BOOT_SW  JUMPER-SMT_2_NC_TRACE_SILK  [SMT-JUMPER_2_NC_TRACE_SILK]  133.54,20.83 270 bottom
BYPASS1  NO PASTE  [SMT-JUMPER_2_SOIC-PAD_NO-PASTE]  104.33,97.03 90 top
BYPASS2  NO PASTE  [SMT-JUMPER_2_SOIC-PAD_NO-PASTE]  105.6,97.03 270 top
C1  2.2uF  [0603]  92.9,42.42 270 top
C2  0.1uF  [0603]  90.87,42.42 270 top
C3  2.2uF  [0603]  116.01,38.99 0 top
C4  10nF  [0603]  116.01,37.34 0 top
C5  2.2uF  [0603]  81.6,78.49 180 top
C6  2.2uF  [0603]  63.69,39.37 180 top
C7  0.1uF  [0603]  63.69,37.72 180 top
C8  2.2uF  [0603]  63.69,48.13 180 top
C9  2.2uF  [0603]  63.69,46.23 180 top
C10  2.2uF  [0603]  63.69,50.04 180 top
C11  47pF  [0603]  99.89,104.52 270 top
C12  1.0uF  [0603]  102.43,84.33 270 top
C13  47pF  [0603]  104.33,102.74 270 top
C14  2.2uF  [0603]  58.61,38.61 180 top
C15  0.1uF  [0603]  58.61,36.7 180 top
C16  100uF  [PANASONIC_D]  50.99,38.61 180 top
C17  0.1uF  [0603]  58.61,46.23 180 top
C18  2.2uF  [0603]  53.28,30.99 90 top
C19  0.1uF  [0603]  56.58,30.99 90 top
C20  10uF  [0603]  54.93,30.99 90 top
C21  0.1uF  [0603]  68.77,83.69 0 top
C22  2.2uF  [0603]  68.77,48.13 0 top
C23  2.2uF  [0603]  68.77,50.04 0 top
C24  1.0uF  [0603]  123.63,96.39 90 top
C25  2.2uF  [0603]  75.76,34.8 270 top
C26  2.2uF  [0603]  77.41,34.8 270 top
C27  10pF  [0603]  68.52,92.84 90 top
C28  10pF  [0603]  70.29,92.84 90 top
C29  2.2uF  [0603]  120.33,96.39 90 top
C30  0.1uF  [0603]  121.98,96.39 90 top
C31  0.1uF  [0603]  96.71,42.42 270 top
C32  10uF  [0603]  68.77,85.6 0 top
C33  0.1uF  [0603]  61.79,79.25 270 top
C34  0.1uF  [0603]  57.98,79.25 270 top
C35  0.1uF  [0603]  56.07,79.25 270 top
C36  0.1uF  [0603]  52.26,81.15 180 top
C37  0.1uF  [0603]  52.26,83.06 180 top
C38  0.1uF  [0603]  56.07,94.49 90 top
C39  10uF  [0603]  47.18,93.22 90 top
C40  10nF  [0603]  63.69,79.25 270 top
C41  4.7uF  [0603]  59.88,79.25 270 top
C42  1nF  [1206]  24.94,88.14 0 top
C43  10nF  [0603]  42.1,83.06 0 top
C44  6.8nF  [0603]  42.1,81.15 180 top
C45  6.8nF  [0603]  42.1,88.77 180 top
C46  22nF  [0603]  42.1,96.39 0 top
C47  10uF  [0805]  47.05,64.52 90 top
C48  100uF  [PANASONIC_D]  39.56,69.09 270 top
C49  10uF  [0805]  44.64,67.82 90 top
C50  10uF  [0805]  46.55,67.82 90 top
C51  10uF  [0805]  49.72,43.69 0 top
C52  0.1uF  [0603]  45.91,100.33 180 top
C53  0.1uF  [0603]  67.5,53.85 90 top
C54  0.1uF  [0603]  67.5,57.66 90 top
C55  10uF  [0603]  45.91,98.68 180 top
C56  2.2uF  [0603]  88.2,28.45 90 top
C57  100uF  [PANASONIC_D]  61.15,56.39 0 top
C58  0.1uF  [0603]  81.47,85.22 180 top
C59  2.2uF  [0603]  68.77,46.23 0 top
C60  2.2uF  [0603]  68.77,38.61 0 top
C61  0.1uF  [0603]  68.77,36.7 0 top
C62  0.1uF  [0603]  81.6,76.84 180 top
C63  18pF  [0603]  150.81,37.21 180 top
C64  18pF  [0603]  150.81,35.43 180 top
C65  0.1uF  [0603]  146.62,42.42 90 top
C66  0.1uF  [0603]  133.54,38.1 180 top
C67  0.1uF  [0603]  133.54,34.8 180 top
C68  0.1uF  [0603]  138.62,28.45 270 top
C69  0.1uF  [0603]  131.25,60.71 90 top
C70  0.1uF  [0603]  123.13,64.77 270 top
C71  47pF  [0603]  30.42,30.99 90 top
C72  47pF  [0603]  33.72,30.99 270 top
C73  47pF  [0603]  35.37,30.99 90 top
C74  47pF  [0603]  32.07,30.99 270 top
C75  0.1uF  [0603]  37.02,30.99 270 top
C76  100uF  [PANASONIC_D]  148.78,65.28 90 top
C77  10uF  [0805]  149.8,99.06 0 top
C78  0.1uF  [0603]  149.8,100.84 0 top
C79  15pF  [0603]  144.72,100.84 180 top
C80  8.2pF  [0603]  144.72,99.19 180 top
C81  68pF  [0603]  147.26,101.73 90 top
C82  33pF  [0603]  146.24,105.28 0 top
C83  33pF  [0603]  129.73,105.28 180 top
C84  10uF  [0805]  49.72,45.47 0 top
C85  10uF  [0805]  49.72,49.53 180 top
C86  47UF  [PANASONIC_D]  15.81,48.77 270 top
D1  PESD0402-0402  [0402]  103.7,107.19 180 top
D2  LED-RIGHT-ANGLE-PTH-GREEN  [CBI-RIGHT-ANGLE-PTH]  19.24,12.57 0 top
D3  PESD0402  [0402]  81.47,106.55 180 top
D4  3A/10V/280mV  [SOD-323]  52.26,52.58 180 top
D5  3A/10V/280mV  [SOD-323]  52.26,57.66 180 top
D6  3A/10V/280mV  [SOD-323]  52.26,55.12 180 top
D7  ESD Diode  [SOT-23-6]  47.18,89.41 270 top
D8  ESD Diode  [SOT-23-6]  146.24,23.37 180 top
D9  3A/10V/280mV  [SOD-323]  52.26,60.2 180 top
D10  ESD Diode  [SOT-23-6]  120.84,23.37 0 top
D11  TVS_DIODE  [SOT23-6L]  25.59,29.08 90 top
D12  PESD0402-0402  [0402]  149.42,107.19 0 top
D13  PESD0402-0402  [0402]  125.92,107.19 180 top
D14  3A/40V  [SMA-DIODE]  15.81,55.75 180 top
D15  PESD0402-0402  [0402]  53.53,103.38 270 top
D16  PESD0402-0402  [0402]  57.09,103.38 270 top
D17  PESD0402-0402  [0402]  60.52,103.38 270 top
D18  PESD0402-0402  [0402]  64.07,103.38 270 top
D19  PESD0402-0402  [0402]  67.5,103.38 270 top
D20  PESD0402-0402  [0402]  71.18,103.38 270 top
DET  TEST-POINTPOGO_PTH  [1X01_NO_SILK]  45.91,27.18 0 top
DTR  TEST-POINTPOGO_PTH  [1X01_NO_SILK]  108.14,36.07 0 top
E$1  [FIDUCIAL-1X2]  4.23,115.95 0 top
E$2  [FIDUCIAL-1X2]  4.23,115.95 0 bottom
E$3  [FIDUCIAL-1X2]  161.25,115.95 0 top
E$4  [FIDUCIAL-1X2]  161.25,115.95 0 bottom
E$5  [FIDUCIAL-1.5X3]  4.23,18.29 0 top
E$6  [FIDUCIAL-1.5X3]  4.23,18.29 0 bottom
ESP32_RF  ANTENNA-SMA-GROUNDEDEDGE_RPSMA  [RP-SMA-EDGE]  82.11,111.25 0 top
ETH_CS  TEST-POINTPOGO_PTH  [1X01_NO_SILK]  106.87,43.69 0 top
ETH_INT  TEST-POINTPOGO_PTH  [1X01_NO_SILK]  104.33,43.69 0 top
F1  6V/2A  [1210]  60.13,62.74 180 top
FB1  600Ω  [0805]  103.44,105.41 0 top
FB2  470Ω  [0603]  52.26,79.25 0 top
FD1  FIDUCIAL1X2  [FIDUCIAL-1X2]  11.62,17.02 0 bottom
FD2  FIDUCIAL1X2  [FIDUCIAL-1X2]  11.62,17.02 0 top
FD3  FIDUCIAL1X2  [FIDUCIAL-1X2]  153.86,108.46 0 bottom
FD4  FIDUCIAL1X2  [FIDUCIAL-1X2]  153.86,108.46 0 top
GND  TEST-POINTPOGO_PTH  [1X01_NO_SILK]  53.53,43.69 90 top
GNSS_RESET  JUMPER-COMBO_2_NO  [COMBO-JUMPER_2_NO]  81.47,89.41 0 bottom
GNSS_RF  ANTENNA-SMA-GROUNDEDEDGE_SMA  [SMA-EDGE]  104.33,111.25 0 top
H1  STAND-OFFTIGHT  [STAND-OFF-TIGHT]  156.4,14.48 0 top
H2  STAND-OFFTIGHT  [STAND-OFF-TIGHT]  156.4,111 0 top
H3  STAND-OFFTIGHT  [STAND-OFF-TIGHT]  9.08,111 0 top
H4  STAND-OFFTIGHT  [STAND-OFF-TIGHT]  9.08,14.48 0 top
H5  STAND-OFFTIGHT  [STAND-OFF-TIGHT]  71.95,22.1 0 top
H6  STAND-OFFTIGHT  [STAND-OFF-TIGHT]  93.54,22.1 0 top
I2C  JUMPER-SMT_3_NO_SILK  [SMT-JUMPER_3_NO_SILK]  82.74,27.18 0 bottom
I2C1  JUMPER-SMT_3_NO_SILK  [SMT-JUMPER_3_NO_SILK]  117.03,99.57 0 bottom
J1  [USB-C-16P_4LAYER-PADS]  120.84,18.29 0 top
J2  [NANO_SIM_PP]  35.62,19.3 0 top
J3  MICRO-SD-PUSH-PUSH-EXT-PIN  [MICROSD-EXTERNALPIN]  54.8,13.97 0 top
J4  Vertical Qwiic Connector  [JST04_1MM_VERT]  82.74,24.64 180 top
J6  [USB-C-16P_4LAYER-PADS]  146.24,18.29 0 top
J8  [U.FL_REDUCED_FOOTPRINT]  82.11,102.74 90 top
J9  MAGJACK-POE  [MAGJACK-SYM_LED]  21.78,104.14 180 top
J13  [1X10_SCREW_TERMINAL_3.5MM]  53.53,110.36 180 top
L1  2.2uH  [0805-WIDE]  44.89,64.26 270 top
L2  DNP  [0603_NO-CREAM]  143.7,106.17 90 top
L3  DNP  [0603_NO-CREAM]  132.27,106.17 90 top
L4  2.2uH  [0805-WIDE]  49.72,47.5 0 top
LARA_RF1  ANTENNA-SMA-GROUNDEDEDGE_SMA  [SMA-EDGE]  148.78,111.25 0 top
LARA_RF2  ANTENNA-SMA-GROUNDEDEDGE_SMA  [SMA-EDGE]  126.56,111.25 0 top
LED  JUMPER-SMT_2_NC_TRACE_SILK  [SMT-JUMPER_2_NC_TRACE_SILK]  19.24,15.11 0 bottom
LINK  JUMPER-SMT_2_NC_TRACE_SILK  [SMT-JUMPER_2_NC_TRACE_SILK]  27.11,110.36 0 bottom
LOAD  JUMPER-SMT_2_NC_TRACE_SILK  [SMT-JUMPER_2_NC_TRACE_SILK]  49.59,64.01 270 top
LOGO2  QWIIC_LOGO_6MM  [QWIIC_6MM]  82.74,27.18 0 top
LOGO4  OSHW-LOGOS  [OSHW-LOGO-S]  131,42.42 0 top
LOGO5  SFE_LOGO_NAME.2_INCH  [SFE_LOGO_NAME_.2]  131,51.31 0 top
LOGO6  SFE_LOGO_FLAME.2_INCH  [SFE_LOGO_FLAME_.2]  134.56,56.39 0 top
LOGO7  SFE_LOGO_NAME.2_INCH  [SFE_LOGO_NAME_.2]  137.35,83.06 0 bottom
LOGO8  SFE_LOGO_FLAME.2_INCH  [SFE_LOGO_FLAME_.2]  133.79,88.14 0 bottom
MEAS  JUMPER-COMBO_2_NC_TRACE  [COMBO-JUMPER_2_NC_TRACE]  54.8,62.74 0 bottom
NEO_RX  TEST-POINTPOGO_PTH  [1X01_NO_SILK]  80.2,80.52 0 top
NEO_TX  TEST-POINTPOGO_PTH  [1X01_NO_SILK]  80.2,83.06 0 top
PICO  TEST-POINTPOGO_PTH  [1X01_NO_SILK]  54.8,27.18 90 top
PM0  JUMPER-SMT_2_NO_SILK  [SMT-JUMPER_2_NO_SILK]  58.36,94.49 270 bottom
PM1  JUMPER-SMT_2_NO_SILK  [SMT-JUMPER_2_NO_SILK]  60.39,94.49 270 bottom
PM2  JUMPER-SMT_2_NO_SILK  [SMT-JUMPER_2_NO_SILK]  62.42,94.49 270 bottom
POCI  TEST-POINTPOGO_PTH  [1X01_NO_SILK]  48.45,27.18 90 top
PW+  JUMPER-COMBO_2_NC_TRACE  [COMBO-JUMPER_2_NC_TRACE]  16.7,90.68 90 bottom
PW-  JUMPER-COMBO_2_NC_TRACE  [COMBO-JUMPER_2_NC_TRACE]  14.16,90.68 90 bottom
PWREN  TEST-POINTPOGO_PTH  [1X01_NO_SILK]  91.63,37.34 0 top
Q1  [SC70-6]  108.14,32.26 180 top
Q2  [SC70-6]  77.66,55.75 0 top
Q5  310mA/60V/1.6Ω  [SOT323]  136.08,61.47 180 top
Q6  310mA/60V/1.6Ω  [SOT323]  132.27,67.82 180 top
R1  5.1k  [0603]  124.65,23.37 270 top
R2  5.1k  [0603]  117.03,23.37 270 top
R3  10k  [0603]  94.81,42.42 270 top
R4  10k  [0603]  110.68,32.26 90 top
R5  10k  [0603]  105.6,32.26 270 top
R6  33  [0603]  109.41,96.39 90 top
R7  27  [0603]  138.37,42.42 90 top
R8  27  [0603]  140.02,42.42 90 top
R9  27  [0603]  143.32,42.42 90 top
R10  27  [0603]  141.67,42.42 90 top
R11  10k  [0603]  50.36,30.99 90 top
R12  12k  [0603]  144.97,42.42 90 top
R13  1M  [0603]  148.15,36.32 90 top
R14  100k  [0603]  143.57,28.45 90 top
R15  10k  [0603]  89.47,34.8 90 top
R16  2.2k  [0603]  78.93,28.45 90 top
R17  100k  [0603]  136.97,28.45 90 top
R18  100k  [0603]  133.54,36.45 180 top
R19  2.2k  [0603]  86.55,28.45 90 top
R20  100k  [0603]  140.27,28.45 90 top
R21  100k  [0603]  141.92,28.45 270 top
R22  27  [0603]  145.35,28.45 90 top
R23  27  [0603]  147.13,28.45 90 top
R24  1M  [0603]  69.41,90.3 0 top
R25  1k  [0603]  68.77,79.88 180 top
R26  1k  [0603]  68.77,81.79 180 top
R27  33  [0603]  112.71,96.39 90 top
R28  10k  [0603]  111.06,96.39 270 top
R29  12.4k  [0603]  52.26,84.96 0 top
R30  10k  [0603]  58.61,94.49 90 top
R31  10k  [0603]  60.39,94.49 90 top
R32  10k  [0603]  62.17,94.49 90 top
R33  5.1k  [0603]  150.05,23.37 270 top
R34  5.1k  [0603]  142.43,23.37 270 top
R35  49.9  [0603]  42.1,86.87 0 top
R36  33  [0603]  52.26,90.68 180 top
R37  33  [0603]  52.26,92.58 180 top
R38  33  [0603]  52.26,86.87 180 top
R39  33  [0603]  52.26,88.77 180 top
R40  49.9  [0603]  42.1,84.96 0 top
R41  49.9  [0603]  42.1,92.58 180 top
R42  49.9  [0603]  42.1,90.68 180 top
R43  10  [0603]  42.1,94.49 0 top
R44  100k  [0603]  133.67,28.45 90 top
R45  49.9 1/2W  [1206]  49.59,67.94 270 top
R46  33  [0603]  122.62,68.71 270 top
R47  33  [0603]  120.97,68.71 270 top
R48  100k  [0603]  59.88,69.09 0 top
R49  10k  [0603]  65.6,79.25 90 top
R50  100k  [0603]  58.61,50.04 0 top
R51  100k  [0603]  58.61,48.13 0 top
R52  100k  [0603]  135.32,28.45 90 top
R53  1k  [0603]  59.88,66.55 180 top
R54  10k  [0603]  77.66,51.69 0 top
R55  49.9 1/2W  [1206]  66.23,65.53 0 top
R56  1k  [0603]  74.49,57.66 90 top
R57  10k  [0603]  77.66,58.55 180 top
R58  10k  [0603]  59.88,71.63 180 top
R59  49.9 1/2W  [1206]  66.23,62.74 0 top
R60  49.9 1/2W  [1206]  66.23,68.33 0 top
R61  49.9 1/2W  [1206]  66.23,71.12 0 top
R62  470  [0603]  19.24,24.64 180 top
R63  1k  [0603]  74.49,53.85 90 top
R64  10k  [0603]  81.47,87.12 0 top
R65  100k  [0603]  48.7,30.99 90 top
R66  27  [0603]  135.06,42.42 90 top
R67  27  [0603]  136.72,42.42 90 top
R68  1k  [0603]  134.81,67.82 90 top
R69  100k  [0603]  140.27,61.47 270 top
R70  1k  [0603]  138.62,61.47 90 top
R71  2.2k  [0603]  116.27,96.39 90 top
R72  2.2k  [0603]  117.92,96.39 90 top
RESET  MOMENTARY-SWITCH-SPST-PTH-RIGHT-ANGLE-8-020  [TACTILE_SWITCH_PTH_RA_8-020]  108.14,15.75 0 top
RESET_SW  JUMPER-SMT_2_NC_TRACE_SILK  [SMT-JUMPER_2_NC_TRACE_SILK]  108.14,20.83 270 bottom
RTS  TEST-POINTPOGO_PTH  [1X01_NO_SILK]  108.14,28.45 0 top
RX  TEST-POINTPOGO_PTH  [1X01_NO_SILK]  115.76,27.18 0 top
RX2  TEST-POINTPOGO_PTH  [1X01_NO_SILK]  58.61,111 0 top
RXD  TEST-POINTPOGO_PTH  [1X01_NO_SILK]  127.19,43.69 0 top
SCK  TEST-POINTPOGO_PTH  [1X01_NO_SILK]  50.99,27.18 90 top
SCL  TEST-POINTPOGO_PTH  [1X01_NO_SILK]  56.07,111 0 top
SCL2  TEST-POINTPOGO_PTH  [1X01_NO_SILK]  77.66,23.37 0 top
SD_CS  TEST-POINTPOGO_PTH  [1X01_NO_SILK]  57.34,27.18 90 top
SDA  TEST-POINTPOGO_PTH  [1X01_NO_SILK]  53.53,111 0 top
SDA2  TEST-POINTPOGO_PTH  [1X01_NO_SILK]  87.82,23.37 0 top
SHLD1  JUMPER-SMT_2_NC_TRACE_SILK  [SMT-JUMPER_2_NC_TRACE_SILK]  120.84,15.11 270 bottom
SHLD2  JUMPER-SMT_2_NC_TRACE_SILK  [SMT-JUMPER_2_NC_TRACE_SILK]  146.24,15.11 270 bottom
SPWR  JUMPER-SMT_3_1-NC_TRACE_SILK  [SMT-JUMPER_3_1-NC_TRACE_SILK]  63.69,46.23 0 bottom
TP  TEST-POINTPOGO_PTH  [1X01_NO_SILK]  66.23,111 0 top
TP_BOOT  TEST-POINTPOGO_PTH  [1X01_NO_SILK]  133.54,24.64 0 top
TP_LED  TEST-POINTPOGO_PTH  [1X01_NO_SILK]  23.05,24.64 0 top
TPWR  JUMPER-SMT_3_1-NC_TRACE_SILK  [SMT-JUMPER_3_1-NC_TRACE_SILK]  68.77,46.23 0 bottom
TX  TEST-POINTPOGO_PTH  [1X01_NO_SILK]  118.3,27.18 0 top
TX2  TEST-POINTPOGO_PTH  [1X01_NO_SILK]  61.15,111 0 top
TXD  TEST-POINTPOGO_PTH  [1X01_NO_SILK]  127.19,41.15 0 top
U1  ESP32-WROVER-IE  [ESP32-WROVER-E/IE]  99.25,55.12 180 top
U2  CH340C  [SO016]  119.57,32.26 0 top
U3  XC6222B331MR-G  [SOT23-5]  63.69,42.42 180 top
U4  U-BLOX_ZED-F9P  [ZED-F9P]  115.76,82.42 270 top
U5  U-BLOX_NEO-D9S-00B  [NEO-M9N/M8T/M8U/D9S]  92.9,85.6 0 top
U6  XC6222B331MR-G  [SOT23-5]  58.61,42.42 180 top
U7  W5500  [LQFP-48]  61.15,86.87 270 top
U8  LARA-R6001D  [LARA-LGA]  138.62,84.33 270 top
U9  74LVC4066D_QUAD_BILATERAL_SWITCH  [SO14]  82.74,34.8 0 top
U10  POE_PSU-DP990X  [DP990X]  25.59,75.44 90 top
U11  MCP6021T  [SOT23-5]  70.68,57.66 90 top
U12  AP7361C-33  [UDFN-8]  68.77,42.42 0 top
U13  MCP6021T  [SOT23-5]  70.68,53.85 90 top
U14  BP2G1+_POWER_SPLITTER  [XX21]  103.7,97.03 180 top
U15  USB251XB_USB2514B  [QFN-36]  139.89,36.07 270 top
U16  SN74AVC4T774PW  [SOP65P640X120-16N]  127.19,62.74 270 top
U17  URB2405YMD  [URB_YMD-15WR3]  33.21,48.77 0 top
U18  74HC1G04  [SOT353]  137.35,67.82 180 top
U$2  [33_#_ZED_RXI0]  117.92,57.66 0 bottom
U$3  [#SHLD#0]  146.88,15.11 0 bottom
U$4  [#I�C#0]  117.03,101.28 0 bottom
U$5  [PW#0]  12.26,88.52 90 top
U$6  [PW#1]  18.61,88.52 90 top
U$7  [0_#_BOOT0]  133.67,22.86 0 top
U$8  [#SAFEBOOT#2226]  108.01,99.57 0 bottom
U$9  [#ACT#0]  17.34,110.36 0 bottom
U$10  [#LINK#1]  28,110.36 0 bottom
U$11  [RTK_EVK0]  131,47.5 0 top
U$12  [#SAFEBOOT#2226]  113.22,104.78 90 top
U$13  [RTK_EVK0]  137.35,79.25 0 bottom
U$14  [NEO_TX2]  84.01,83.06 0 bottom
U$15  [NEO_RX3]  84.01,80.52 0 bottom
U$16  [GND2]  44.77,103 90 top
U$17  [3V3_SW20]  68.64,30.61 90 top
U$18  [GND2]  44.77,102.87 270 bottom
U$19  [12_#_SDA20]  87.69,27.81 270 bottom
U$20  [15_#_SCL213]  77.53,27.69 270 bottom
U$21  [ESP32_WIFI_#_BT0]  77.03,113.03 90 top
U$22  [3V3_SW3]  48.32,101.73 90 top
U$23  [3V3_SW3]  48.32,101.6 270 bottom
U$24  [VCCA0]  54.67,78.74 90 top
U$25  [21_#_SDA4]  51.75,101.6 90 top
U$26  [21_#_SDA4]  51.75,101.35 270 bottom
U$28  [22_#_SCL22]  55.18,101.47 90 top
U$29  [27_#_#ETH_CS#0]  112.33,43.81 0 top
U$30  [22_#_SCL22]  55.18,101.35 270 bottom
U$31  [ZED_RX223]  58.86,101.47 90 top
U$32  [ZED_RX223]  58.86,101.35 270 bottom
U$33  [ZED_TX2224]  62.42,101.35 90 top
U$34  [1_#_TX20]  121.73,27.18 0 top
U$35  [3_#_RX20]  112.59,27.18 0 top
U$36  [ZED_TX2224]  62.42,101.09 270 bottom
U$37  [ZED_EXTINT2225]  65.85,100.2 90 top
U$38  [ZED_EXTINT2225]  65.85,99.95 270 bottom
U$39  [ZED_TP2226]  69.41,101.98 90 top
U$40  [ZED_TP2226]  69.41,101.85 270 bottom
U$41  [#SAFEBOOT#2226]  101.92,72.77 90 top
U$42  [ANT_DET2227]  77.66,48.39 0 top
U$43  [#ANT_SHT#2228]  77.53,61.85 0 top
U$44  [9#2230]  53.66,68.07 0 top
U$45  [#SHLD#0]  121.48,15.11 0 bottom
U$46  [#I�C#0]  82.74,28.89 0 bottom
U$47  [99#2230]  56.32,68.07 0 top
U$48  [#I�C#0]  139.89,29.15 0 bottom
U$49  [V_ANT2229]  73.98,70.36 0 top
U$55  [RTS2231]  105.73,28.45 0 top
U$56  [DTR2232]  105.73,36.07 0 top
U$57  [2_#_LED0]  19.11,24.77 0 bottom
U$58  [#LED#2234]  20.13,15.11 0 bottom
U$59  [3V3_SW25]  63.69,35.81 90 top
U$60  [3V325]  58.74,34.54 90 top
U$61  [5V25]  64.58,52.2 0 top
U$62  [MEAS2]  57.47,64.52 0 top
U$63  [VIN#0]  35.37,100.71 270 bottom
U$64  [36_#_SD_DET0]  46.04,21.72 270 bottom
U$65  [3V3_SW20]  68.77,30.48 270 bottom
U$66  [2_#_LED0]  20.38,26.04 0 top
U$67  [#PMODE0#0]  58.36,89.92 270 bottom
U$68  [#PMODE1#1]  60.39,90.04 270 bottom
U$69  [#PMODE2#2]  62.42,89.92 270 bottom
U$70  [VIN#0]  35.37,100.84 90 top
U$71  [VIN#1]  41.21,100.71 270 bottom
U$72  [VIN#1]  41.21,100.84 90 top
U$73  [14_#_RXDO0]  118.17,43.69 0 top
U$74  [#RESET#0]  76.52,89.53 0 bottom
U$75  [13_#_TXDI15]  118.68,41.15 0 top
U$76  [RTS2231]  105.6,28.45 0 bottom
U$77  [DTR2232]  105.6,36.07 0 bottom
U$78  [ESP320]  115,15.62 90 top
U$79  [39_#_#ETH_INT#0]  105.85,42.16 0 top
U$80  [PWR_EN2233]  95.44,37.34 0 bottom
U$81  [V_POE0]  48.7,60.2 0 bottom
U$82  [V_USB3]  48.7,57.66 0 bottom
U$83  [V_USB24]  48.7,55.12 0 bottom
U$84  [MEAS2]  51.75,64.52 0 bottom
U$85  [VIN1]  48.83,52.58 0 bottom
U$86  [5V25]  61.02,52.58 0 bottom
U$87  [3V325]  58.74,29.97 270 bottom
U$88  [3V3_SW25]  63.69,28.58 270 bottom
U$89  [4_#_#SD_CS#15]  57.34,22.86 270 bottom
U$90  [25_#_ZED_TXO0]  117.92,55.12 0 bottom
U$91  [NO0]  92.9,86.87 0 top
U$92  [NO0]  138.62,85.6 0 top
U$93  [#SAFEBOOT#2226]  96.46,78.11 0 bottom
U$94  [ANT_DET2227]  77.41,48.39 0 bottom
U$95  [#ANT_SHT#2228]  73.22,60.33 0 bottom
U$96  [CELLULAR2]  138.62,83.06 0 top
U$97  [L#BAND1]  92.9,84.33 0 top
U$98  [23_#_PICO23]  54.8,22.73 270 bottom
U$99  [1_#_TX20]  121.6,27.18 0 bottom
U$100  [3_#_RX20]  112.46,27.18 0 bottom
U$101  [19_#_POCI19]  48.45,22.86 270 bottom
U$102  [18_#_SCK6]  50.99,23.24 270 bottom
U$103  [13_#_TXDI15]  126.81,43.69 0 bottom
U$104  [99#2230]  56.2,68.07 0 bottom
U$105  [V_ANT2229]  73.85,70.36 0 bottom
U$106  [9#2230]  53.53,68.07 0 bottom
U$107  [VCCA0]  57.85,81.79 0 bottom
U$108  [14_#_RXDO0]  126.81,41.15 0 bottom
U$110  [39_#_#ETH_INT#0]  104.08,43.81 0 bottom
U$111  [27_#_#ETH_CS#0]  112.33,43.81 0 bottom
U$113  [PW#0]  12.26,92.84 270 bottom
U$114  [PW#1]  18.61,92.96 270 bottom
U$115  [VCCIO0]  114.87,66.8 0 top
U$116  [VCCIO0]  117.92,65.28 0 bottom
U$117  [#3V3_SW_EN#0]  62.29,46.23 0 bottom
U$118  [#3V3_SW2_EN#0]  70.17,46.23 0 bottom
U$135  [GND12]  53.53,42.04 0 bottom
U$136  [POE_LOAD0]  38.29,62.74 0 top
U$141  [PWR_EN2233]  95.57,37.34 0 top
U$143  [GND12]  53.53,45.47 0 top
U$146  [HIGH_TEMP_WARNING]  49.72,74.17 0 top
U$147  [HIGH_TEMP_WARNING]  39.05,75.82 0 top
U$148  [RESET0]  108.01,22.86 0 bottom
U$149  [0_#_BOOT0]  133.54,22.86 0 bottom
U$152  [RTK5#SVG0]  146.24,52.07 0 top
U$153  [RTK5#SVG0]  122.11,83.95 0 bottom
U$154  [#GNSS_RESET#0]  88.33,89.53 0 bottom
USB251SCL  [SMT-JUMPER_2_NO_SILK]  140.91,30.99 90 bottom
USB251SDA  [SMT-JUMPER_2_NO_SILK]  138.87,30.99 90 bottom
VANT  TEST-POINTPOGO_PTH  [1X01_NO_SILK]  70.04,70.36 0 top
VCCA  TEST-POINTPOGO_PTH  [1X01_NO_SILK]  54.8,81.79 0 top
VCCIO  TEST-POINTPOGO_PTH  [1X01_NO_SILK]  118.3,65.28 0 top
VID1  10k  [0603]  102.43,42.42 90 top
VID2  1k  [0603]  100.52,42.42 90 top
VIN  TEST-POINTPOGO_PTH  [1X01_NO_SILK]  48.45,52.58 0 top
VIN+  JUMPER-COMBO_2_NC_TRACE  [COMBO-JUMPER_2_NC_TRACE]  37.02,100.84 90 bottom
VIN-  JUMPER-COMBO_2_NC_TRACE  [COMBO-JUMPER_2_NC_TRACE]  39.56,100.84 270 bottom
VPOE  TEST-POINTPOGO_PTH  [1X01_NO_SILK]  48.45,60.2 0 top
VUSB  TEST-POINTPOGO_PTH  [1X01_NO_SILK]  48.45,57.66 0 top
VUSB2  TEST-POINTPOGO_PTH  [1X01_NO_SILK]  48.45,55.12 0 top
Y1  25MHz  [CRYSTAL-SMD-2.0X1.6MM]  69.02,88.01 270 top
Y2  24MHz  [CRYSTAL-SMD-2.0X1.6MM]  145.86,36.32 0 top
ZED_EXTINT  TEST-POINTPOGO_PTH  [1X01_NO_SILK]  63.69,111 0 top
ZED_RXI  TEST-POINTPOGO_PTH  [1X01_NO_SILK]  118.3,57.66 0 top
ZED_TXO  TEST-POINTPOGO_PTH  [1X01_NO_SILK]  118.3,55.12 0 top

## Library data of the parts
3V3 3V3_SW 3V3_SW2 5V 9% 99% !SAFEBOOT_NEO! !SAFEBOOT_ZED! ANT_DET ANT_SHT DET DTR ETH_CS ETH_INT GND NEO_RX NEO_TX PICO POCI PWREN RTS RX RX2 RXD SCK SCL SCL2 SD_CS SDA SDA2 TP TP_BOOT TP_LED TX TX2 TXD VANT VCCA VCCIO VIN VPOE VUSB VUSB2 ZED_EXTINT ZED_RXI ZED_TXO = SparkFun-Connectors
ACT BOOT_SW BYPASS1 BYPASS2 GNSS_RESET I2C I2C1 LED LINK LOAD MEAS PM0 PM1 PM2 PW+ PW- RESET_SW SHLD1 SHLD2 SPWR TPWR USB251SCL USB251SDA VIN+ VIN- = SparkFun-Jumpers
BOOT RESET = SparkFun-Switches; PROD_ID: SWCH-13896
C1 C3 C5 C6 C8-C10 C14 C18 C22 C23 C25 C26 C29 C56 C59 C60 = SparkFun-Capacitors; PROD_ID: CAP-07888
C2 C7 C15 C17 C19 C21 C30 C31 C33-C38 C52-C54 C58 C61 C62 C65-C70 C75 C78 = SparkFun-Capacitors; PROD_ID: CAP-08604
C4 C40 C43 = SparkFun-Capacitors; PROD_ID: CAP-00867
C11 C13 C71-C74 = SparkFun-Capacitors; PROD_ID: CAP-08913
C12 C24 = SparkFun-Capacitors; PROD_ID: CAP-00868
C16 C48 C57 C76 = SparkFun-Capacitors; PROD_ID: CAP-12547
C20 C32 C39 C55 = SparkFun-Capacitors; PROD_ID: CAP-11015
C27 C28 = SparkFun-Capacitors; PROD_ID: CAP-11812
C41 = SparkFun-Capacitors; PROD_ID: CAP-08280
C42 = SparkFun-Capacitors; PROD_ID: CAP-16238
C44 C45 = SparkFun-Capacitors; PROD_ID: CAP-16239
C46 = SparkFun-Capacitors; PROD_ID: CAP-07885
C47 C49-C51 C77 C84 C85 = SparkFun-Capacitors; PROD_ID: CAP-14259
C63 C64 = SparkFun-Capacitors; PROD_ID: CAP-08267
C79 = SparkFun-Capacitors; PROD_ID: CAP-07881
C80 = SparkFun-Capacitors; PROD_ID: CAP-16662
C81 = SparkFun-Capacitors; PROD_ID: CAP-14092
C82 C83 = SparkFun-Capacitors; PROD_ID: CAP-10142
C86 = SparkFun-Capacitors; PROD_ID: CAP-10547
D1 D3 D12 D13 D15-D20 = SparkFun-DiscreteSemi; DIGIKEY_PART: PESD0402-140CT-ND; MOUSE_PART: 650-PESD0402-140; PROD_ID: DIO-15359
D2 = SparkFun-LED; PROD_ID: DIO-13847
D4-D6 D9 = SparkFun-DiscreteSemi; PROD_ID: DIO-14072
D7 D8 D10 = SparkFun-DiscreteSemi; PROD_ID: IC-13538
D11 = SparkFun-DiscreteSemi; PROD_ID: DIO-14095
D14 = SparkFun-DiscreteSemi; PROD_ID: DIO-09886
E$1-E$4 FD1-FD4 LOGO2 LOGO4-LOGO8 U$146 U$147 = SparkFun-Aesthetics
E$5 E$6 = SparkFun-Retired
ESP32_RF = SparkFun-RF; PROD_ID: CONN-00827
F1 = SparkFun-Fuses; PROD_ID: RES-14313
FB1 = SparkFun-Coils; PROD_ID: NDUC-14988
FB2 = SparkFun-Coils; PROD_ID: NDUC-12579
GNSS_RF LARA_RF1 LARA_RF2 = SparkFun-RF; PROD_ID: CONN-08289
H1-H6 = SparkFun-Hardware
J1 J6 = SparkFun-Connectors; PROD_ID: CONN-14122
J2 = SparkFun-Connectors; PROD_ID: CONN-16272
J3 = SparkFun-Connectors; PROD_ID: CONN-16110
J4 = SparkFun-Connectors; PROD_ID: CONN-14483
J8 = SparkFun-Connectors; PROD_ID: CONN-09193
J9 = SparkFun-Connectors; PROD_ID: CONN-16253
J13 = SparkFun-Connectors; PROD_ID: CONN-17279; STOREFRONT: PRT-21328
L1 L4 = SparkFun-Coils; PROD_ID: NDUC-14234
L2 L3 = SparkFun-Coils
Q1 Q2 = SparkFun-DiscreteSemi; PROD_ID: TRANS-13337
Q5 Q6 = SparkFun-DiscreteSemi; PROD_ID: TRANS-11151
R1 R2 R33 R34 = SparkFun-Resistors; PROD_ID: RES-12083
R3-R5 R11 R15 R28 R30-R32 R49 R54 R57 R58 R64 VID1 = SparkFun-Resistors; PROD_ID: RES-00824
R6 R27 R36-R39 R46 R47 = SparkFun-Resistors; PROD_ID: RES-08270
R7-R10 R22 R23 R66 R67 = SparkFun-Resistors; PROD_ID: RES-09334
R12 = SparkFun-Resistors; PROD_ID: RES-10327
R13 R24 = SparkFun-Resistors; PROD_ID: RES-07868
R14 R17 R18 R20 R21 R44 R48 R50-R52 R65 R69 = SparkFun-Resistors; PROD_ID: RES-07828
R16 R19 R71 R72 = SparkFun-Resistors; PROD_ID: RES-08272
R25 R26 R53 R56 R63 R68 R70 VID2 = SparkFun-Resistors; PROD_ID: RES-07856
R29 = SparkFun-Resistors; PROD_ID: RES-16236
R35 R40-R42 = SparkFun-Resistors; PROD_ID: RES-16237
R43 = SparkFun-Resistors; PROD_ID: RES-12581
R45 R55 R59-R61 = SparkFun-Resistors; PROD_ID: RES-16252
R62 = SparkFun-Resistors; PROD_ID: RES-07869
U1 = SparkFun-RF; PROD_ID: IC-19265
U2 = SparkFun-IC-Comms; PROD_ID: IC-14038
U3 U6 = SparkFun-IC-Power; IOUT: 700mA; PROD_ID: VREG-16775; VOUT: 3.3V
U4 = SparkFun-GPS; PROD_ID: IC-14209
U5 = SparkFun-GPS; PROD_ID: IC-16579
U7 = SparkFun-IC-Comms; PROD_ID: IC-16240
U8 = SparkFun-RF; PROD_ID: IC-16661
U9 = SparkFun-IC-Logic; PROD_ID: IC-13944
U10 = SparkFun-IC-Power; PROD_ID: IC-16251
U11 U13 = SparkFun-IC-Amplifiers; PROD_ID: IC-12504
U12 = SparkFun-IC-Power; PROD_ID: VREG-14094
U14 = SparkFun-RF; PROD_ID: IC-17198
U15 = SparkFun-IC-Special-Function; PROD_ID: IC-15827
U16 = SparkFun-IC-Comms; PROD_ID: IC-15360
U17 = SparkFun-IC-Power; PROD_ID: COMP-19263
U18 = SparkFun-IC-Logic; PROD_ID: COMP-08268
U$2-U$26 U$28-U$49 U$55-U$108 U$110 U$111 U$113-U$118 U$135 U$136 U$141 U$143 U$148 U$149 U$152-U$154 = output
Y1 = SparkFun-Clocks; PROD_ID: XTAL-16235
Y2 = SparkFun-Clocks; PROD_ID: XTAL-14845

## Nets
3.3V: 3V3.1 C1.1 C2.1 C3.1 C4.1 C14.1 C15.1 C25.1 C26.1 I2C.2 R3.2 U1.2 U2.4 U2.16 U6.5 U9.14 VID2.1
3.3V_SW: 3V3_SW.1 C5.1 C6.1 C7.1 C12.1 C18.1 C19.1 C20.1 C21.1 C24.1 C29.1 C30.1 C32.1 C52.1 C55.1 C56.1 C62.1 FB2.1 I2C1.2 J3.4 J4.2 J9.11 J9.13 J13.7 R11.2 R18.2 R28.2 R30.2 R31.2 R32.2 R54.1 R57.1 R64.2 R65.2 U3.5 U4.33 U4.34 U4.36 U4.38 U5.7 U5.22 U5.23 U7.28 U15.5 U15.10 U15.15 U15.23 U15.29 U15.36
3.3V_SW2: 3V3_SW2.1 C60.1 C61.1 C76.+ C77.1 C78.1 C79.1 C80.1 C81.1 U8.51 U8.52 U8.53 U12.1 U16.15 U18.5
5V: 5V.1 C8.1 C9.1 C10.1 C17.1 C22.1 C23.1 C53.1 C54.1 C57.+ C59.1 F1.1 R50.2 R51.2 R53.1 R55.1 R59.1 R60.1 R61.1 U3.1 U6.1 U6.3 U11.5 U12.8 U13.5
5V_RAW: C48.+ C49.1 C50.1 L1.1 U10.1 U10.2
5V_RAW1: C16.+ C51.1 C84.1 L4.1 U17.4
9%: 9%.1 R48.2 R58.1 U13.3
99%: 99%.1 R48.1 R53.2 U11.4
!ANT_SHORT!: ANT_SHT.1 Q2.6 R57.2 U4.6
!RESET!: C31.1 GNSS_RESET.2 GNSS_RESET.4 Q1.3 R3.1 RESET_SW.1 U1.3 U7.37 U9.12
!SAFEBOOT_NEO!: !SAFEBOOT_NEO!.1 U5.1
!SAFEBOOT_ZED!: !SAFEBOOT_ZED!.1 U4.50
ACT: ACT.1 J9.14
ACT_LED: R26.2 U7.27
ANT: C13.2 U14.2
ANT_DET: ANT_DET.1 Q2.3 R54.2 U4.4
ANT_NEO: U5.11 U14.5
ANT_ZED: U4.2 U14.8
BYPASS: BYPASS1.1 BYPASS2.1
CH340-DTR: DTR.1 Q1.1 R4.2 U2.13
CH340-RTS: Q1.4 R5.2 RTS.1 U2.14
CH340-RXI: TX.1 U1.35 U2.3
CH340-TXO: RX.1 U1.34 U2.2
D+: D10.1 J1.A6 J1.B6 U2.5
D+_LARA: R10.1 U15.2
D+_NEO: R66.1 U15.7
D+_UBLOX: D8.1 J6.A6 J6.B6 R23.1
D+_ZED: R7.1 U15.4
D-: D10.3 J1.A7 J1.B7 U2.6
D-_LARA: R9.1 U15.1
D-_NEO: R67.1 U15.6
D-_UBLOX: D8.3 J6.A7 J6.B7 R22.1
D-_ZED: R8.1 U15.3
ESP0/!BOOT!: BOOT_SW.1 Q1.6 TP_BOOT.1 U1.25
ESP2/LED: R62.1 TP_LED.1 U1.24
ESP4/!SD_CS!: J3.2 SD_CS.1 U1.26
ESP5/TP: U1.29 U9.8
ESP12/SDA2: U1.14 U9.4
ESP13/LARA_TXDI: TXD.1 U1.16 U16.12
ESP14/LARA_RXDO: RXD.1 U1.13 U16.13
ESP15/SCL2: U1.23 U9.1
ESP18/SCK: J3.5 SCK.1 U1.30 U7.33
ESP19/POCI: J3.7 POCI.1 R11.1 U1.31 U7.34
ESP21/SDA: D15.1 J13.6 R72.1 SDA.1 U1.33 U4.44 U5.18 USB251SDA.1
ESP22/SCL: D16.1 J13.5 R71.1 SCL.1 U1.36 U4.45 U5.19 USB251SCL.1
ESP23/PICO: J3.3 PICO.1 U1.37 U7.35
ESP25/ZED_TXO: U1.10 U4.42 ZED_TXO.1
ESP26/LARA_PWR_ON: R69.2 R70.1 U1.11
ESP27/!ETH_CS!: ETH_CS.1 U1.12 U7.32
ESP32/PWREN: U1.8 U9.11
ESP33/ZED_RXI: U1.9 U4.43 ZED_RXI.1
ESP34/LARA_NI: U1.6 U16.14
ESP35/VID: U1.7 VID1.2 VID2.2
ESP36/SD_DET: DET.1 J3.9 R65.1 U1.4
ESP39/!ETH_INT!: ETH_INT.1 U1.5 U7.36
GND: BOOT.1 C1.2 C2.2 C3.2 C4.2 C5.2 C6.2 C7.2 C8.2 C9.2 C10.2 C11.2 C12.2 C14.2 C15.2 C16.- C17.2 C18.2 C19.2 C20.2 C21.2 C22.2 C23.2 C24.2 C25.2 C26.2 C27.2 C28.2 C29.2 C30.2 C31.2 C32.2 C33.2 C34.2 C35.2 C36.2 C37.2 C38.2 C39.2 C40.2 C41.2 C42.2 C43.2 C46.2 C47.2 C48.- C49.2 C50.2 C51.2 C52.2 C53.2 C54.2 C55.2 C56.2 C57.- C58.2 C59.2 C60.2 C61.2 C62.2 C63.1 C64.1 C65.2 C66.2 C67.2 C68.2 C69.2 C70.2 C71.2 C72.1 C73.2 C74.1 C75.1 C76.- C77.2 C78.2 C79.2 C80.2 C81.2 C84.2 C85.2 D1.2 D2.C D3.2 D7.2 D8.2 D10.2 D11.2 D11.5 D12.2 D13.2 D15.2 D16.2 D17.2 D18.2 D19.2 D20.2 ESP32_RF.GND@0 ESP32_RF.GND@1 ESP32_RF.GND@2 ESP32_RF.GND@3 GND.1 GNSS_RF.GND@0 GNSS_RF.GND@1 GNSS_RF.GND@2 GNSS_RF.GND@3 J1.GND J1.GND2 J2.C5 J3.6 J3.10 J3.11 J3.12 J3.13 J4.1 J6.GND J6.GND2 J8.1 J8.2 J13.8 L2.2 L3.2 LARA_RF1.GND@0 LARA_RF1.GND@1 LARA_RF1.GND@2 LARA_RF1.GND@3 LARA_RF2.GND@0 LARA_RF2.GND@1 LARA_RF2.GND@2 LARA_RF2.GND@3 PM0.1 PM1.1 PM2.1 Q2.1 Q2.4 Q5.2 Q6.2 R1.1 R2.1 R12.2 R14.1 R15.1 R17.1 R20.1 R29.1 R33.1 R34.1 R44.1 R45.1 R49.1 R52.1 R58.2 R69.1 RESET.1 SHLD1.1 SHLD2.1 U1.1 U1.15 U1.38 U1.GND U1.GNDT1 U1.GNDT2 U1.GNDT3 U1.GNDT4 U1.GNDT5 U1.GNDT6 U1.GNDT7 U1.GNDT8 U2.1 U3.2 U4.1 U4.3 U4.12 U4.14 U4.32 U4.37 U4.41 U4.48 U4.55 U4.56 U4.57 U4.58 U4.59 U4.60 U4.61 U4.62 U4.63 U4.64 U4.65 U4.66 U4.67 U4.68 U4.69 U4.70 U4.71 U4.72 U4.73 U4.74 U4.75 U4.76 U4.77 U4.78 U4.79 U4.80 U4.81 U4.82 U4.83 U4.84 U4.85 U4.86 U4.87 U4.88 U4.89 U4.90 U4.91 U4.92 U4.93 U4.94 U4.95 U4.96 U4.97 U4.98 U4.99 U4.100 U4.101 U4.102 U5.10 U5.12 U5.13 U5.24 U6.2 U7.3 U7.9 U7.14 U7.16 U7.19 U7.29 U7.48 U8.1 U8.3 U8.5 U8.9 U8.10 U8.14 U8.20 U8.21 U8.22 U8.30 U8.32 U8.43 U8.50 U8.54 U8.55 U8.57 U8.58 U8.60 U8.61 U8.63 U8.64 U8.65 U8.66 U8.67 U8.68 U8.69 U8.70 U8.71 U8.72 U8.73 U8.74 U8.75 U8.76 U8.77 U8.78 U8.79 U8.80 U8.81 U8.82 U8.83 U8.84 U8.85 U8.86 U8.87 U8.88 U8.89 U8.90 U8.91 U8.92 U8.93 U8.94 U8.95 U8.96 U9.7 U10.3 U11.2 U12.4 U12.EP U13.2 U14.1 U14.3 U14.4 U14.6 U14.7 U15.11 U15.EP U16.7 U16.9 U16.10 U17.6 U18.3 VID1.1
GND-ISO: C42.1 J9.7 J9.8 J9.S1 J9.S2
GNSS_!RESET!: C58.1 GNSS_RESET.1 GNSS_RESET.3 R64.1 U4.49 U5.8 U18.2
LARA_18_NI: U8.16 U16.3
LARA_18_RXDO: U8.13 U16.4
LARA_18_TXDI: U8.12 U16.5
LARA_!RESET!: Q6.3 U8.18
LARA_PWR_ON: Q5.3 U8.15
LINK: J9.12 LINK.1
LINK_LED: R25.2 U7.25
MEAS: D4.C D5.C D6.C D9.C MEAS.2 MEAS.4
N$1: J1.B5 R1.2
N$2: J1.A5 R2.2
N$3: R7.2 U4.40
N$4: Q1.2 R5.1
N$5: Q1.5 R4.1
N$6: R8.2 U4.39
N$7: LED.2 R62.2
N$8: J6.SHLD1 J6.SHLD2 J6.SHLD3 J6.SHLD4 SHLD2.2
N$9: R27.1 U4.51
N$10: F1.2 MEAS.1 MEAS.3
N$11: R46.1 U4.27
N$12: ACT.2 R26.1
N$13: D3.1 ESP32_RF.SIG J8.FEED
N$14: I2C.3 R16.2
N$15: I2C.1 R19.2
N$16: R68.1 U18.4
N$17: R66.2 U5.6
N$18: R67.2 U5.5
N$19: C27.1 R24.1 U7.31 Y1.1
N$20: C28.1 R24.2 U7.30 Y1.3
N$21: LINK.2 R25.1
N$22: R50.1 SPWR.3
N$23: R29.2 U7.10
N$24: C40.1 U7.22
N$25: C41.1 U7.20
N$26: SPWR.2 U3.3
N$27: LOAD.1 R45.2
N$28: RESET.2 RESET_SW.2
N$29: BOOT.2 BOOT_SW.2
N$30: R49.2 U7.23
N$31: R51.1 TPWR.3
N$32: R47.1 U4.26
N$33: J6.B5 R33.2
N$34: J6.A5 R34.2
N$35: R56.1 U11.1
N$36: R6.1 U4.53
N$38: Q2.5 R56.2
N$39: TPWR.2 U12.5
N$40: Q2.2 R63.2
N$41: R63.1 U13.1
N$42: Q6.1 R68.2
N$43: I2C1.3 R71.2
N$44: I2C1.1 R72.2
N$45: D2.A LED.1
N$46: R9.2 U8.28
N$47: R10.2 U8.29
N$48: C63.2 R13.2 U15.33 Y2.3
N$49: C64.2 R13.1 U15.32 Y2.1
N$50: R12.1 U15.35
N$51: R14.2 U15.28
N$52: R17.2 U15.25
N$53: C65.1 U15.34
N$54: C66.1 U15.14
N$55: R22.2 U15.30
N$56: R23.2 U15.31
N$61: C82.2 D12.1 LARA_RF1.SIG
N$62: C82.1 L2.1 U8.56
N$63: C83.2 D13.1 LARA_RF2.SIG
N$64: C83.1 L3.1 U8.62
N$65: Q5.1 R70.2
NEO_RXI: NEO_RX.1 U5.21
NEO_TXO: NEO_TX.1 U5.20
PMODE0: PM0.2 R30.1 U7.45
PMODE1: PM1.2 R31.1 U7.44
PMODE2: PM2.2 R32.1 U7.43
PW1+: PW+.1 PW+.3 U10.5 U10.6
PW1-: PW-.1 PW-.3 U10.7 U10.8
PW+: J9.9 PW+.2 PW+.4
PW-: J9.10 PW-.2 PW-.4
PWREN: PWREN.1 R15.2 SPWR.1 TPWR.1 U9.5 U9.6 U9.10 U9.13
RCT: C43.1 J9.5 R35.1 R40.1
RD+: C45.2 J9.3
RD-: C44.2 J9.6
RF: C13.1 D1.1 FB1.2 GNSS_RF.SIG
RXN: R39.1 U7.5
RXN1: C44.1 D7.4 R39.2 R40.2
RXP: R38.1 U7.6
RXP1: C45.1 D7.3 R35.2 R38.2
SCL2: J4.4 R16.1 SCL2.1 U9.2
SDA2: J4.3 R19.1 SDA2.1 U9.3
SHIELD: J1.SHLD1 J1.SHLD2 J1.SHLD3 J1.SHLD4 SHLD1.2
SIM_CLK: C71.1 D11.1 J2.C3 U8.38
SIM_IO: C74.2 D11.6 J2.C7 U8.39
SIM_RST: C72.2 D11.4 J2.C2 U8.40
TCT: C46.1 J9.4 R43.1
TD+: D7.6 J9.1 R36.2 R41.1
TD-: D7.1 J9.2 R37.2 R42.1
TXN: R37.1 U7.1
TXP: R36.1 U7.2
USB251SCL: R52.2 U15.24 USB251SCL.2
USB251SDA: R44.2 U15.22 USB251SDA.2
USB_!RESET: C67.1 R18.1 U15.26
V_ANT: C11.1 FB1.1 R55.2 R59.2 R60.2 R61.2 U11.3 U13.4 VANT.1
V_POE: C47.1 D9.A L1.2 LOAD.2 VPOE.1
V_USB: D5.A D10.5 J1.VBUS1 J1.VBUS2 VUSB.1
V_USB_2: D6.A D8.5 J6.VBUS1 J6.VBUS2 R21.2 U8.17 VUSB2.1
VBUS_DET: C68.1 R20.2 R21.1 U15.27
VCCA: C33.1 C34.1 C35.1 C36.1 C37.1 C38.1 C39.1 D7.5 FB2.2 R41.2 R42.2 R43.2 U7.4 U7.8 U7.11 U7.15 U7.17 U7.21 VCCA.1
VCCIO: C69.1 C70.1 U8.4 U16.1 U16.2 U16.6 U16.8 U16.16 VCCIO.1
VIN: C85.1 D4.A L4.2 VIN.1
VIN1+: D14.A VIN+.1 VIN+.3
VIN1-: C86.- U17.2 VIN-.2 VIN-.4
VIN2+: C86.+ D14.C U17.3
VIN+: J13.10 VIN+.2 VIN+.4
VIN-: J13.9 VIN-.1 VIN-.3
VSIM: C73.1 C75.2 D11.3 J2.C1 U8.41
ZED_EXTINT: D19.1 J13.2 R27.2 R28.1 ZED_EXTINT.1
ZED_RX2: D17.1 J13.4 R47.2 RX2.1
ZED_TP: D20.1 J13.1 R6.2 TP.1 U9.9
ZED_TX2: D18.1 J13.3 R46.2 TX2.1